# EAGLE board main_board (EAGLE 9.6.2)
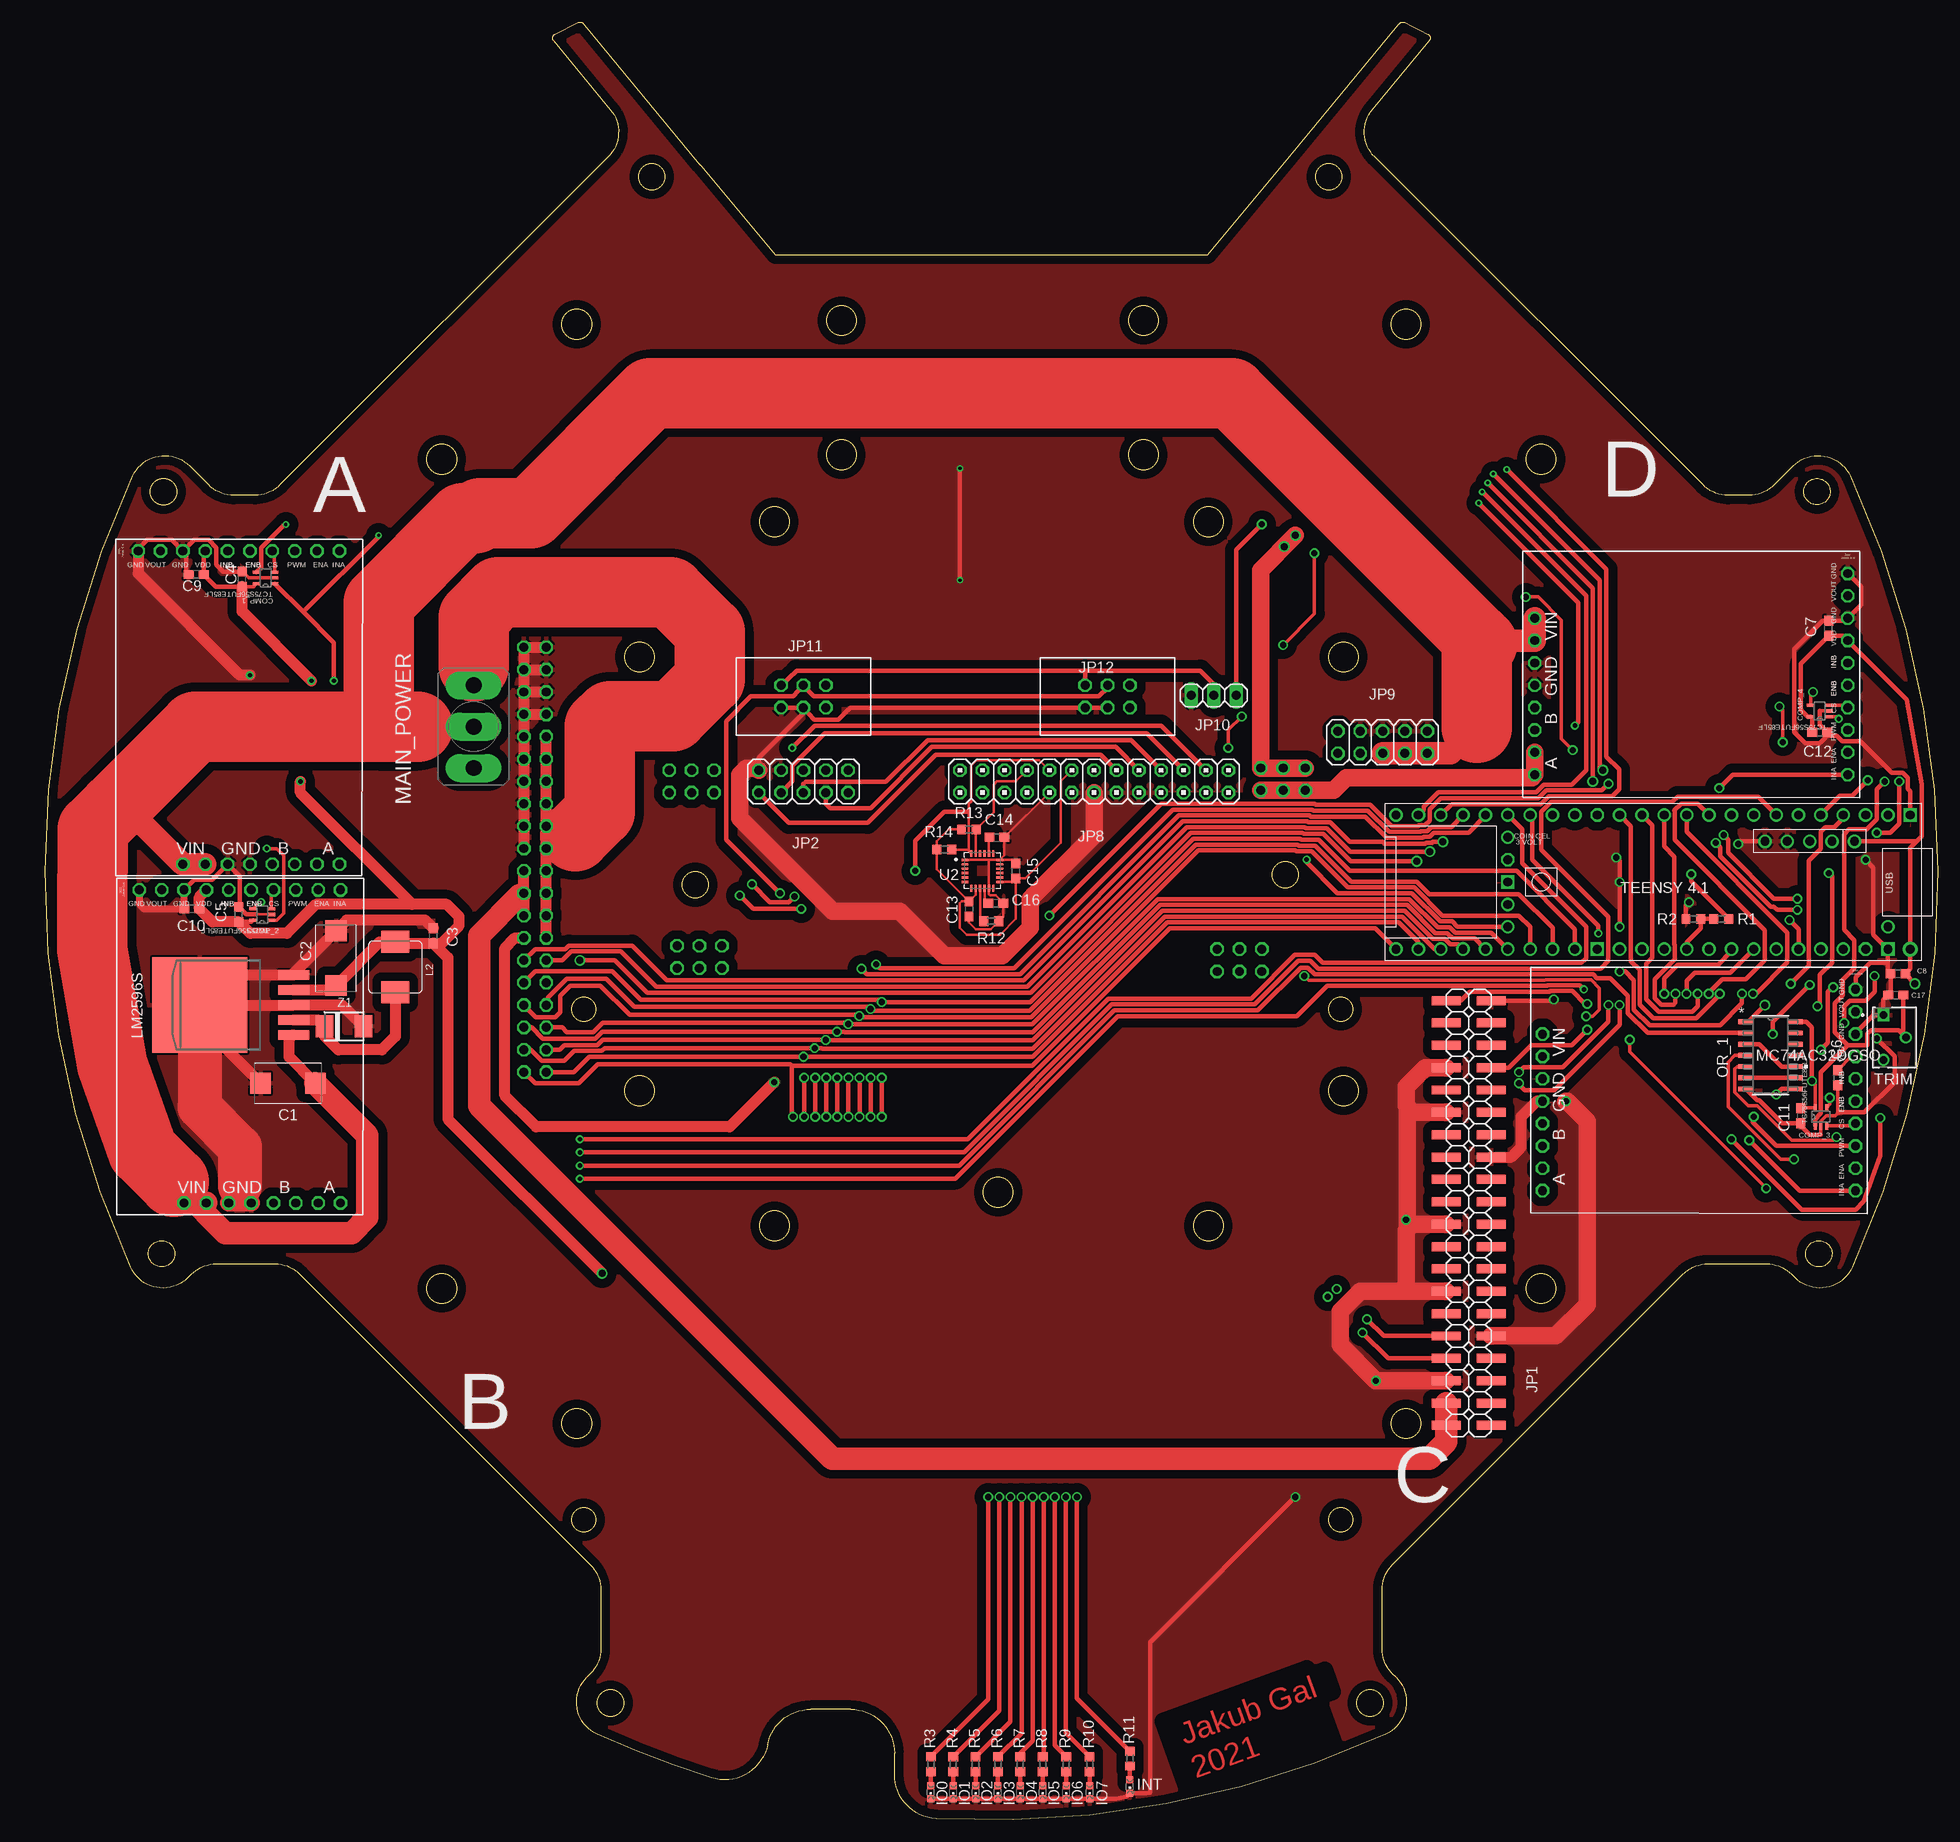
[diagram p0: board, top side]
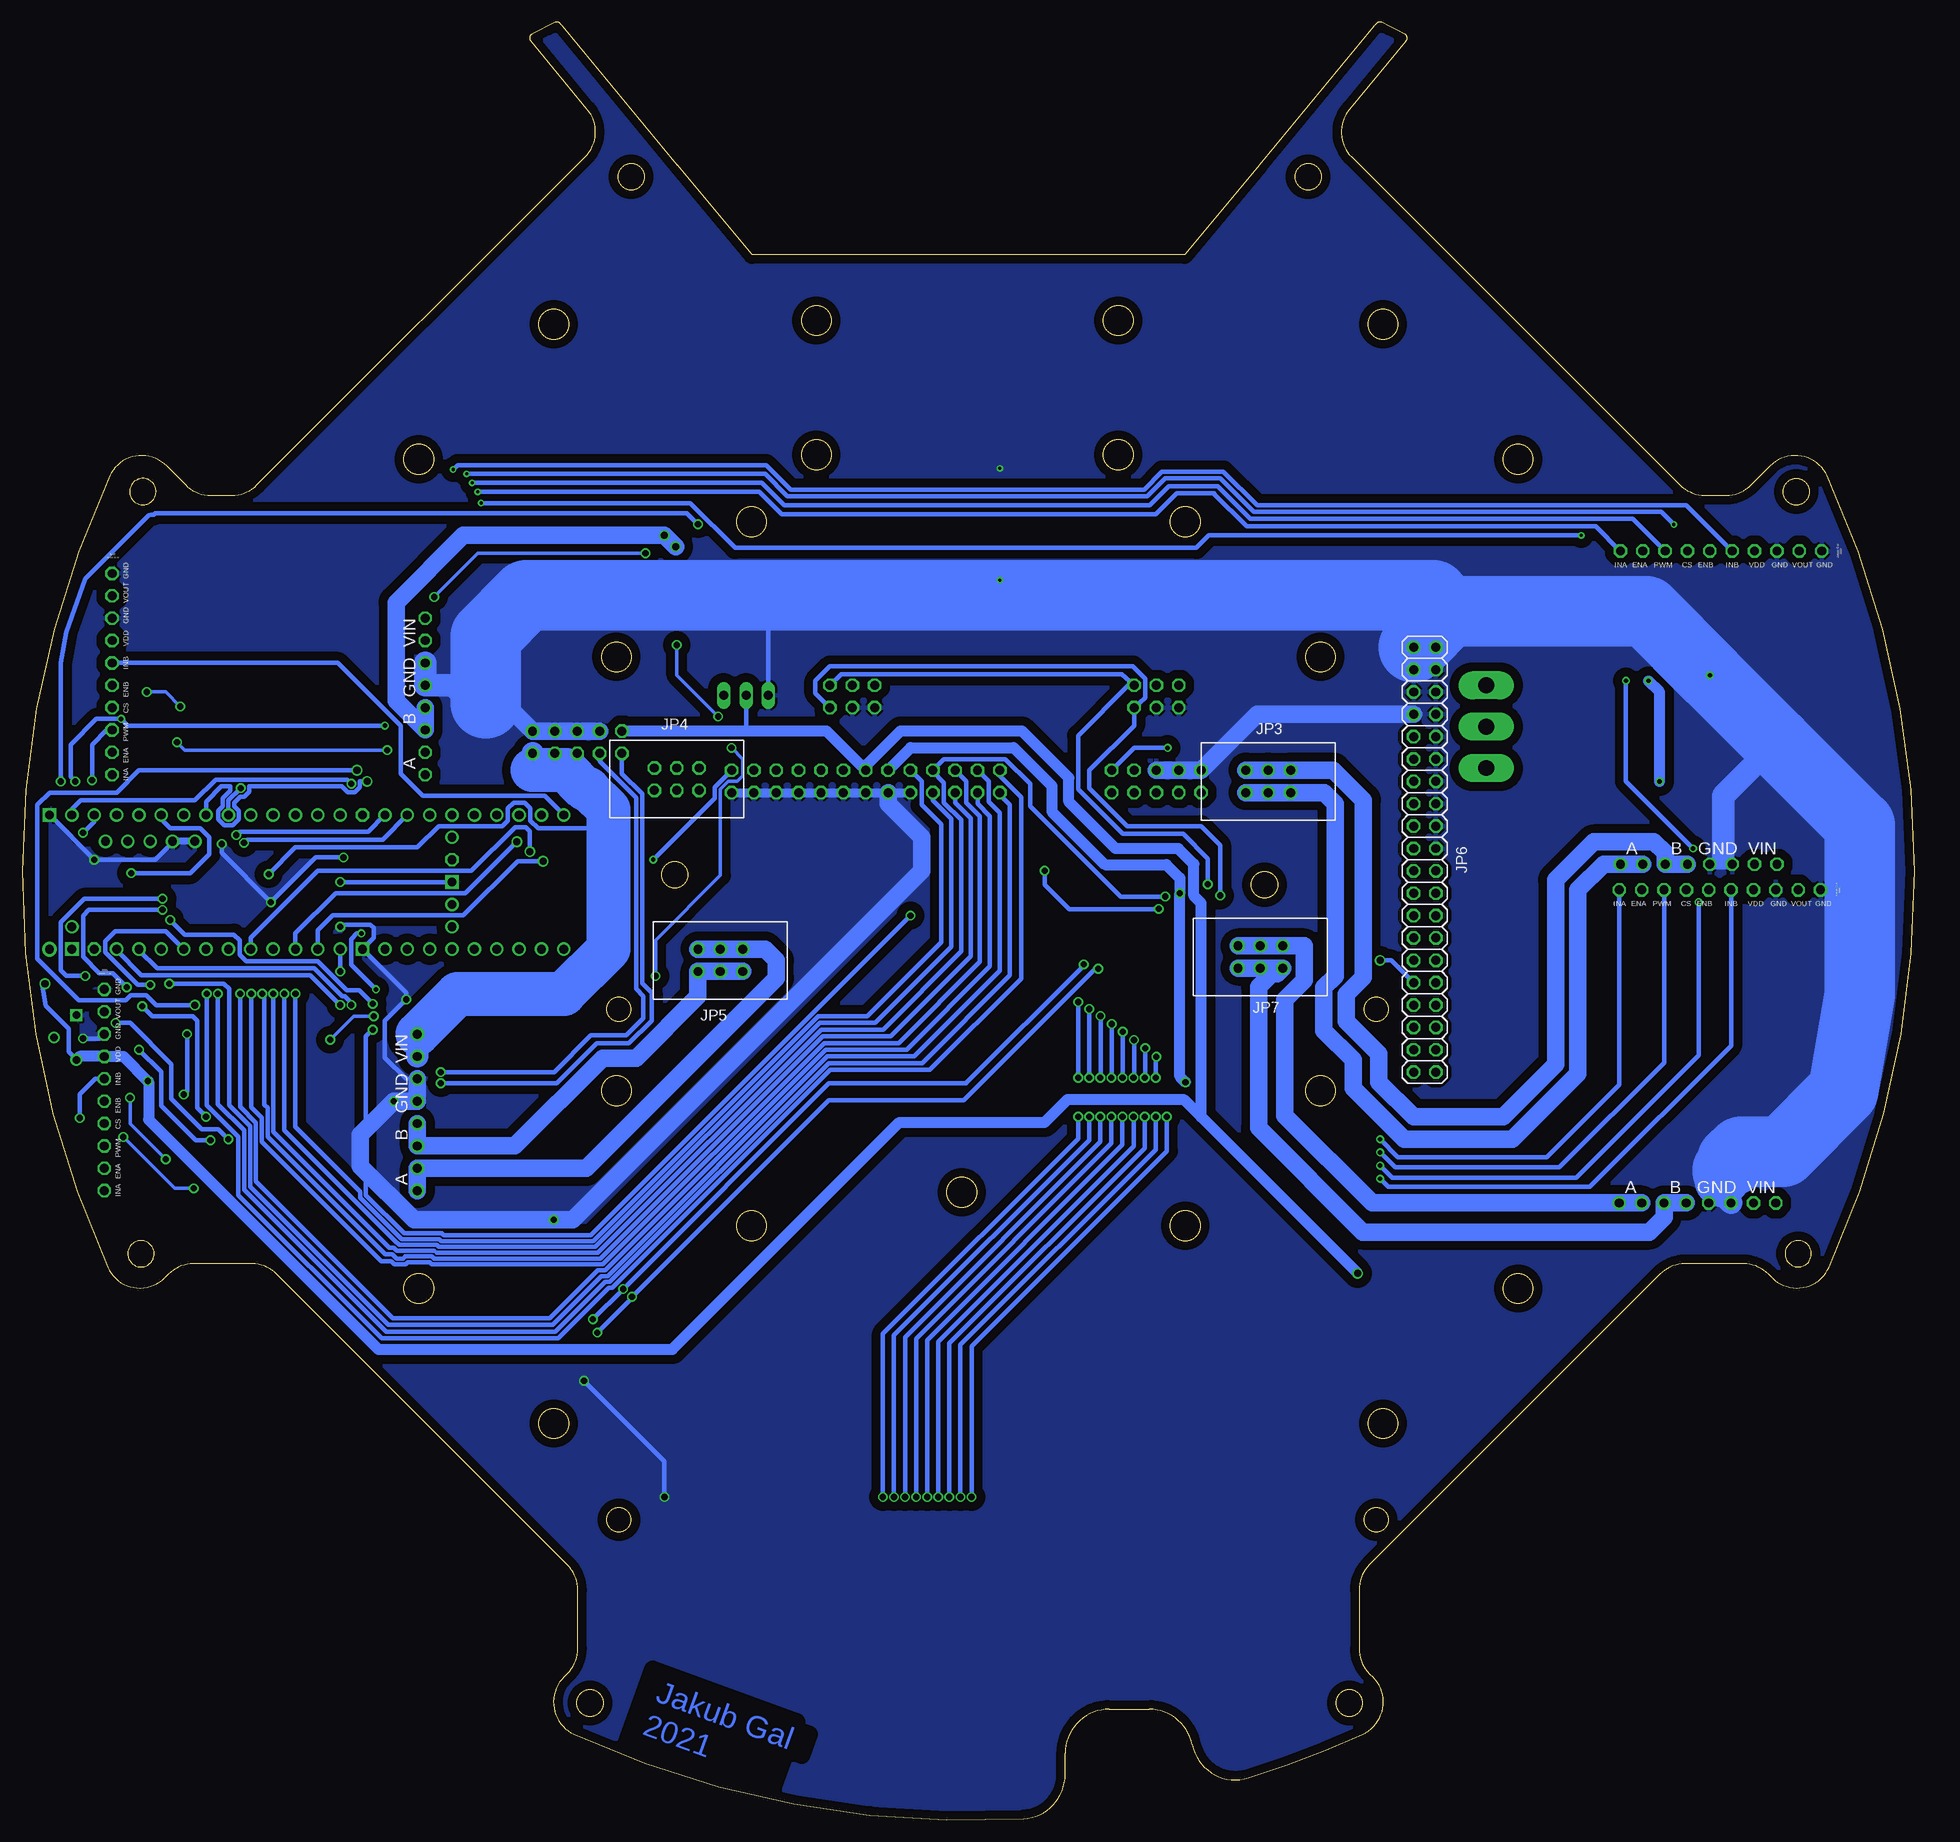
[diagram p1: board, bottom side, seen from below]

Size 215 x 204.23 mm. Coordinates in mm from the lower left corner, seen from the top.
Outline: 201.27,152.38 arc-199 200.78,149.47 arc-161 201.27,152.38
Outline: 201.48,65.82 arc-148 202.28,63.05 arc-212 201.48,65.82
Outline: 13.24,65.82 arc-231 12.07,63.38 arc-129 13.24,65.82
Outline: 74.49,187.97 74.44,187.97 61.32,203.85 61.15,204.05 61.13,204.08 arc20 60.99,204.18 60.99,204.18 arc52 60.55,204.18 arc2 57.92,202.86 arc102 57.77,202.1 64.23,194.28 arc-85 63.97,188.91 26.67,151.64 arc-45 23.84,150.47 21.42,150.47 arc-45 18.59,151.65 16.42,153.82 arc110 9.96,152.67 arc49 9.74,62.76 arc110 16.2,61.59 16.62,62 arc-45 19.44,63.17 26.13,63.17 arc-45 28.96,62 61.96,28.97 arc-45 63.13,26.15 63.13,19.46 arc-45 61.95,16.63 61.54,16.22 arc110 62.7,9.75 arc7 75.7,4.78 arc96 82.08,8.57 arc-79 86.98,12.57 91.5,12.57 arc-90 96.5,7.57 96.5,5.15 arc87 101.21,0.16 arc28 152.3,9.75 arc110 153.46,16.22 153.04,16.63 arc-45 151.87,19.46 151.87,26.15 arc-45 153.04,28.97 186.04,62 arc-45 188.87,63.17 195.55,63.17 arc-45 198.38,62 198.79,61.59 arc110 205.26,62.76 arc49 205.04,152.67 arc110 198.58,153.82 196.41,151.65 arc-45 193.58,150.47 191.16,150.47 arc-45 188.33,151.64 151.03,188.91 arc-85 150.77,194.28 157.23,202.1 arc102 157.08,202.86 arc2 154.45,204.18 arc52 154.01,204.18 154.01,204.18 arc23 153.85,204.06 153.84,204.05 153.68,203.85 140.55,187.97 140.51,187.97 132.05,177.77 82.94,177.77 74.49,187.97
Outline: circle at 61.19,92.11 radius 1.38
Outline: circle at 147.19,34.11 radius 1.38
Outline: circle at 67.51,132.11 radius 1.7
Outline: circle at 68.91,186.64 radius 1.5
Outline: circle at 132.14,147.46 radius 1.7
Outline: circle at 13.46,150.88 radius 1.5
Outline: circle at 147.49,132.11 radius 1.7
Outline: circle at 154.59,45.03 radius 1.7
Outline: circle at 61.19,34.11 radius 1.38
Outline: circle at 169.94,154.57 radius 1.7
Outline: circle at 150.49,13.28 radius 1.5
Outline: circle at 67.51,82.83 radius 1.7
Outline: circle at 73.86,106.23 radius 1.5
Outline: circle at 132.14,67.49 radius 1.7
Outline: circle at 147.49,82.83 radius 1.7
Outline: circle at 60.41,45.03 radius 1.7
Outline: circle at 45.06,60.38 radius 1.7
Outline: circle at 64.23,13.28 radius 1.5
Outline: circle at 145.81,186.64 radius 1.5
Outline: circle at 82.86,67.49 radius 1.7
Copper layers (1*16): Top 0.035mm / dielectric 1.5mm / Bottom 0.035mm
Design rules "default": minimum track width 6mil, minimum drill 0.35mm, track to track 6mil, track to pad 6mil, pad to pad 6mil, via to via 6mil, smd to smd 6mil, copper to edge 40mil, drill to drill 6mil, minimum pad ring 10mil, minimum via ring 8mil, stop-mask expansion 4mil, vias tented up to drill 0mil, thermal gap 10mil
tRestrict: area 127,2.5 to 146.5,17.2
bRestrict: area 127,2.5 to 146.5,17.1

## Footprints (pad centres in the part's own frame; a part is rotated, then mirrored left to right if it is on the bottom)
CAPM7343X310 = smd 2.368 x 2.404: 1 -3.121,0; 2 3.121,0
C0603 = smd 1.1 x 1: 1 -0.85,0; 2 0.85,0
SOT-353___(USV)_TOS = smd 0.833 x 0.355: 1 -1.039,0.65; 2 -1.039,0; 3 -1.039,-0.65; 4 1.039,-0.65; 5 1.039,0.65
MOTOR_DRIVER = drill 1 octagon: CS -2.54,-17.78; ENA/DIAGA -7.62,-17.78; ENB/DIAGB 0,-17.78; GND 0,17.78; GND_1 2.54,17.78; GND_2 7.62,-17.78; GND_3 12.7,-17.78; INA -10.16,-17.78; INB 2.54,-17.78; OUTA -10.16,17.78; OUTA_1 -7.62,17.78; OUTB -5.08,17.78; OUTB_1 -2.54,17.78; PWM -5.08,-17.78; VDD 5.08,-17.78; VIN 5.08,17.78; VIN_1 7.62,17.78; VOUT 10.16,-17.78
CHIPLED_0603 = smd 0.8 x 0.8: A 0,-0.75; C 0,0.75
2X20SMD = smd 1.016 x 3.302: 1 -1.27,-3.81; 2 -1.27,1.27; 3 1.27,-3.81; 4 1.27,1.27; 5 3.81,-3.81; 6 3.81,1.27; 7 6.35,-3.81; 8 6.35,1.27; 9 8.89,-3.81; 10 8.89,1.27; 11 11.43,-3.81; 12 11.43,1.27; 13 13.97,-3.81; 14 13.97,1.27; 15 16.51,-3.81; 16 16.51,1.27; 17 19.05,-3.81; 18 19.05,1.27; 19 21.59,-3.81; 20 21.59,1.27; 21 24.13,-3.81; 22 24.13,1.27; 23 26.67,-3.81; 24 26.67,1.27; 25 29.21,-3.81; 26 29.21,1.27; 27 31.75,-3.81; 28 31.75,1.27; 29 34.29,-3.81; 30 34.29,1.27; 31 36.83,-3.81; 32 36.83,1.27; 33 39.37,-3.81; 34 39.37,1.27; 35 41.91,-3.81; 36 41.91,1.27; 37 44.45,-3.81; 38 44.45,1.27; 39 46.99,-3.81; 40 46.99,1.27
2X05 = drill 1.016 octagon: 1 -5.08,-1.27; 2 -5.08,1.27; 3 -2.54,-1.27; 4 -2.54,1.27; 5 0,-1.27; 6 0,1.27; 7 2.54,-1.27; 8 2.54,1.27; 9 5.08,-1.27; 10 5.08,1.27
2X03_IDC = drill 1.016 octagon: 1 -2.54,-1.27; 2 -2.54,1.27; 3 0,-1.27; 4 0,1.27; 5 2.54,-1.27; 6 2.54,1.27
2X20 = drill 1.016 octagon: 1 -24.13,-1.27; 2 -24.13,1.27; 3 -21.59,-1.27; 4 -21.59,1.27; 5 -19.05,-1.27; 6 -19.05,1.27; 7 -16.51,-1.27; 8 -16.51,1.27; 9 -13.97,-1.27; 10 -13.97,1.27; 11 -11.43,-1.27; 12 -11.43,1.27; 13 -8.89,-1.27; 14 -8.89,1.27; 15 -6.35,-1.27; 16 -6.35,1.27; 17 -3.81,-1.27; 18 -3.81,1.27; 19 -1.27,-1.27; 20 -1.27,1.27; 21 1.27,-1.27; 22 1.27,1.27; 23 3.81,-1.27; 24 3.81,1.27; 25 6.35,-1.27; 26 6.35,1.27; 27 8.89,-1.27; 28 8.89,1.27; 29 11.43,-1.27; 30 11.43,1.27; 31 13.97,-1.27; 32 13.97,1.27; 33 16.51,-1.27; 34 16.51,1.27; 35 19.05,-1.27; 36 19.05,1.27; 37 21.59,-1.27; 38 21.59,1.27; 39 24.13,-1.27; 40 24.13,1.27
2X13 = drill 1.016 octagon: 1 -15.24,-1.27; 2 -15.24,1.27; 3 -12.7,-1.27; 4 -12.7,1.27; 5 -10.16,-1.27; 6 -10.16,1.27; 7 -7.62,-1.27; 8 -7.62,1.27; 9 -5.08,-1.27; 10 -5.08,1.27; 11 -2.54,-1.27; 12 -2.54,1.27; 13 0,-1.27; 14 0,1.27; 15 2.54,-1.27; 16 2.54,1.27; 17 5.08,-1.27; 18 5.08,1.27; 19 7.62,-1.27; 20 7.62,1.27; 21 10.16,-1.27; 22 10.16,1.27; 23 12.7,-1.27; 24 12.7,1.27; 25 15.24,-1.27; 26 15.24,1.27
1X03 = drill 1.016 long: 1 -2.54,0; 2 0,0; 3 2.54,0
INDUCTOR_L0630 = smd 2.5 x 3.2: 1 -2.85,0; 2 2.85,0
TO263-5 = smd 1.067 x 3.505: 1 -3.404,0.762; 2 -1.702,0.762; 3 0,0.762; 4 1.702,0.762; 5 3.404,0.762 | smd 10.82 x 10.82: 6 0,11.43
P-B069B = drill 1.803 pad 3.175 long: 1 -4.699,0; 2 0,0; 3 4.699,0
SOIC-14_NB_ONS-M = smd 1.702 x 0.533: 1 -2.807,3.81; 2 -2.807,2.54; 3 -2.807,1.27; 4 -2.807,0; 5 -2.807,-1.27; 6 -2.807,-2.54; 7 -2.807,-3.81; 8 2.807,-3.81; 9 2.807,-2.54; 10 2.807,-1.27; 11 2.807,0; 12 2.807,1.27; 13 2.807,2.54; 14 2.807,3.81
R0603 = smd 1 x 1.1: 1 -0.85,0; 2 0.85,0
TENNSY41-E = drill 1: 0-RX1/CS1/CRX2 -27.94,-7.62; 1-TX1/MISO1/CTX2 -25.4,-7.62; 2-OUT2 -22.86,-7.62; 3-LRCLK2 -20.32,-7.62; 4-BCLK2 -17.78,-7.62; 5-IN2 -15.24,-7.62; 6-OUT1D -12.7,-7.62; 7-RX2/OUT1A -10.16,-7.62; 8-TX2/IN1 -7.62,-7.62; 9-OUT1C -5.08,-7.62; 10-CS\MQSR -2.54,-7.62; 11-MOSI/CTX1 0,-7.62; 12-MISO/MQSL 2.54,-7.62; 13-SCK/LED 2.54,7.62; 14-A0/TX3/SPDIF_OUT 0,7.62; 15-A1/RX3/SPDIF_IN -2.54,7.62; 16-A2/RX4/SCL1 -5.08,7.62; 17-A3/TX4/SDA1 -7.62,7.62; 18-A4/SDA0 -10.16,7.62; 19-A5/SCL0 -12.7,7.62; 20-A6/TX5/LRCLK1 -15.24,7.62; 21-A7/RX5/BCLK1 -17.78,7.62; 22-A8/CTX1 -20.32,7.62; 23-A9/CRX1/MCLK1 -22.86,7.62; 24-A10/TX6/SCL2 7.62,-7.62; 25-A11/RX6/SDA2 10.16,-7.62; 26-A12/MOSI1 12.7,-7.62; 27-A13/SCK1 15.24,-7.62; 28-RX7 17.78,-7.62; 29-TX7 20.32,-7.62; 30-CRX3 22.86,-7.62; 31-CTX3 25.4,-7.62; 32-OUT1B 27.94,-7.62; 33-MCLK2 27.94,7.62; 34-RX8 25.4,7.62; 35-TX8 22.86,7.62; 36-PWM 20.32,7.62; 37-PWM 17.78,7.62; 38-A14/CS/IN1 15.24,7.62; 39-A15/CS/OUT1A 12.7,7.62; 40-A16/CS1 10.16,7.62; 41-A17/MISO1 7.62,7.62; +5V -24.13,-4.62; DM -21.59,-4.62; DP -19.05,-4.62; GND4 -16.51,-4.62; GND5 -13.97,-4.62; ON/OFF 15.24,5.08; PROGRAM 15.24,2.54; VBAT 15.24,-5.08; VUSB -27.94,5.08 | drill 1 octagon: 3V3-1 5.08,-7.62; 3V3-2 15.24,-2.54; 3V3-3 -25.4,7.62 | drill 1 square: GND1 -30.48,-7.62; GND2 15.24,0; GND3 5.08,7.62; GND6 -27.94,7.62 | drill 1 pad 1.676: VIN -30.48,7.62
POT_3362W = drill 0.838 pad 1.346 square: 1 0,0 | drill 0.838 pad 1.346: 2 2.54,2.54; 3 5.08,0
QFN50P400X400X95-24N = smd 0.79 x 0.26: 1 -1.97,1.25; 2 -1.97,0.75; 3 -1.97,0.25; 4 -1.97,-0.25; 5 -1.97,-0.75; 6 -1.97,-1.25; 13 1.97,-1.25; 14 1.97,-0.75; 15 1.97,-0.25; 16 1.97,0.25; 17 1.97,0.75; 18 1.97,1.25 | smd 0.26 x 0.79: 7 -1.25,-1.97; 8 -0.75,-1.97; 9 -0.25,-1.97; 10 0.25,-1.97; 11 0.75,-1.97; 12 1.25,-1.97; 19 1.25,1.97; 20 0.75,1.97; 21 0.25,1.97; 22 -0.25,1.97; 23 -0.75,1.97; 24 -1.25,1.97
SUPRESSOR_SMAJ = smd 2 x 2.5: A 2.223,0; C -2.223,0

## Placement (x,y rotation side)
C1  330uF  [CAPM7343X310]  27.6,83.68 180 top
C2  220uF  [CAPM7343X310]  33.06,97.9 90 top
C3  100nF  [C0603]  44.11,100.44 90 top
C4  100nF  [C0603]  22.39,140.96 90 top
C5  100nF  [C0603]  22.01,102.86 90 top
C6  100nF  [C0603]  203.62,84.31 270 top
C7  100nF  [C0603]  202.6,135.37 90 top
C8  100nF  [C0603]  210.48,96.12 180 top
C9  100nF  [C0603]  17.18,141.46 180 top
C10  100nF  [C0603]  16.68,103.49 180 top
C11  100nF  [C0603]  199.43,80 270 top
C12  100nF  [C0603]  201.59,123.56 0 top
C13  10nF  [C0603]  104.94,103.49 270 top
C14  2200pF  [C0603]  108.12,111.62 0 top
C15  100nF  [C0603]  110.27,107.81 90 top
C16  100nF  [C0603]  107.99,104.13 0 top
C17  100nF  [C0603]  210.22,93.71 0 top
COMP_1  TC75S56FUTE85LF  [SOT-353___(USV)_TOS]  25.06,141.08 180 top
COMP_2  TC75S56FUTE85LF  [SOT-353___(USV)_TOS]  24.68,102.86 180 top
COMP_3  TC75S56FUTE85LF  [SOT-353___(USV)_TOS]  201.71,79.87 90 top
COMP_4  TC75S56FUTE85LF  [SOT-353___(USV)_TOS]  201.59,125.97 180 top
DRIVER_A  MOTOR_DRIVER  [MOTOR_DRIVER]  23.28,126.35 180 top
DRIVER_B  MOTOR_DRIVER  [MOTOR_DRIVER]  23.41,87.87 180 top
DRIVER_C  MOTOR_DRIVER  [MOTOR_DRIVER]  187.87,81.65 90 top
DRIVER_D  MOTOR_DRIVER  [MOTOR_DRIVER]  186.98,128.89 90 top
INT  LEDCHIPLED_0603  [CHIPLED_0603]  123.23,3.8 180 top
IO0  LEDCHIPLED_0603  [CHIPLED_0603]  100.62,3.16 180 top
IO1  LEDCHIPLED_0603  [CHIPLED_0603]  103.16,3.16 180 top
IO2  LEDCHIPLED_0603  [CHIPLED_0603]  105.7,3.16 180 top
IO3  LEDCHIPLED_0603  [CHIPLED_0603]  108.24,3.16 180 top
IO4  LEDCHIPLED_0603  [CHIPLED_0603]  110.78,3.16 180 top
IO5  LEDCHIPLED_0603  [CHIPLED_0603]  113.32,3.16 180 top
IO6  LEDCHIPLED_0603  [CHIPLED_0603]  115.99,3.16 180 top
IO7  LEDCHIPLED_0603  [CHIPLED_0603]  118.66,3.16 180 top
JP1  [2X20SMD]  160.44,46.09 90 top
JP2  [2X05]  86.14,117.97 0 top
JP3  [2X03_IDC]  73.44,117.97 0 bottom
JP4  [2X03_IDC]  140.63,118.22 0 bottom
JP5  [2X03_IDC]  135.67,97.65 180 bottom
JP6  [2X20]  55.66,109.08 90 bottom
JP7  [2X03_IDC]  74.33,98.03 180 bottom
JP8  [2X13]  119.16,117.97 180 top
JP9  [2X05]  151.93,122.41 0 top
JP10  [1X03]  132.75,127.75 180 top
JP11  [2X03_IDC]  86.14,127.62 0 top
JP12  [2X03_IDC]  120.69,127.62 0 top
L2  22UH  [INDUCTOR_L0630]  39.79,96.89 90 top
LM2596S  LM2596S-5  [TO263-5]  28.99,92.57 90 top
MAIN_POWER  [P-B069B]  48.68,124.19 270 top
OR_1  MC74AC32DGSO  [SOIC-14_NB_ONS-M]  196,86.85 0 top
R1  10K  [R0603]  190.41,102.35 180 top
R2  2K  [R0603]  187.24,102.35 180 top
R3  220R  [R0603]  100.62,6.34 90 top
R4  220R  [R0603]  103.16,6.34 90 top
R5  220R  [R0603]  105.7,6.34 90 top
R6  220R  [R0603]  108.24,6.34 90 top
R7  220R  [R0603]  110.78,6.34 90 top
R8  220R  [R0603]  113.32,6.34 90 top
R9  220R  [R0603]  115.99,6.34 90 top
R10  220R  [R0603]  118.66,6.34 90 top
R11  220R  [R0603]  123.23,6.97 90 top
R12  4.7K  [R0603]  107.48,102.09 0 top
R13  4.7K  [R0603]  104.94,112.51 0 top
R14  4.7K  [R0603]  102.15,110.22 0 top
TEENSY41  TEENSY41-E  [TENNSY41-E]  181.39,106.54 180 top
TRIM  3362W-1-103LF  [POT_3362W]  208.83,91.43 270 top
U2  MPU-6050  [QFN50P400X400X95-24N]  106.46,107.81 0 top
Z1  1n5824  [SUPRESSOR_SMAJ]  33.95,90.16 0 top

## Library data of the parts
C1 C2 = Capacitor; CATEGORY: Capacitor
C3-C17 = rcl; SPICEPREFIX: C
COMP_1-COMP_4 = comparator
DRIVER_A DRIVER_B DRIVER_C DRIVER_D = Moja
INT IO0 IO1-IO7 = audio amplifier example
JP1-JP9 JP11 JP12 = pinhead-1
JP10 = Connector; CATEGORY: CONNECTOR; SUB-CATEGORY: PIN-HEADER
L2 = BeagleBone_Blue_R3
LM2596S MAIN_POWER = TABOR K1
OR_1 = 74VHC32D; COPYRIGHT: Copyright (C) 2016 Accelerated Designs. All rights reserved; MANUFACTURER_PART_NUMBER: MC74VHC32DR2G; SOURCELIBRARY: ONSemi_2017-12-12_1; VENDOR: ON Semiconductor
R1-R14 = rcl; SPICEPREFIX: R
TEENSY41 = teensy
TRIM = 3362; BUILT_BY: EMA_UL_Team; MANUFACTURER_PART_NUMBER: 3362W-1-103LF; SOURCELIBRARY: Bourns_2012-08-08; VENDOR: Bourns Electronics
U2 = MPU-6050; AVAILABILITY: Warning; DESCRIPTION: Accelerometer, Gyroscope, 6 Axis Sensor I²C Output; DIGIKEY-PURCHASE-URL: https://snapeda.com/shop?store=DigiKey&id=4705740; MF: TDK InvenSense; MOUSER-PURCHASE-URL: https://snapeda.com/shop?store=Mouser&id=4705740; MP: MPU-6050; PACKAGE: VFQFN-24 TDK InvenSense; PRICE: None
Z1 = 52101-101-REV-A

## Nets
3.3V: C13.1 C15.1 JP6.13 JP8.15 JP11.4 JP12.4 R13.1 R14.1 U2.8 U2.13
3.3V_0: JP1.1
3.3V_1: JP1.17
5V: C2.1 C3.1 C4.1 C5.1 C6.1 C7.1 C8.1 C9.1 C10.1 C11.1 C12.1 COMP_1.5 COMP_2.5 COMP_3.5 COMP_4.5 DRIVER_A.VDD DRIVER_B.VDD DRIVER_C.VDD DRIVER_D.VDD JP8.13 JP9.2 JP10.2 JP11.2 JP12.2 L2.2 LM2596S.4 OR_1.14 TEENSY41.+5V TEENSY41.VIN TRIM.3
5V_JATSON: JP1.2 JP1.4 JP6.15 JP6.17 JP6.19
AUTO_ON: JP2.7 JP8.9
BAT: C1.1 DRIVER_A.VIN DRIVER_A.VIN_1 DRIVER_B.VIN DRIVER_B.VIN_1 DRIVER_C.VIN DRIVER_C.VIN_1 DRIVER_D.VIN DRIVER_D.VIN_1 JP9.5 JP9.7 JP9.9 LM2596S.1 MAIN_POWER.2 R1.1
BAT_IN: JP6.14 JP6.16 JP6.18 JP6.20 JP6.22 JP6.24 JP6.26 JP6.28 JP6.30 JP6.32 MAIN_POWER.1
CAMERA_PWM: JP10.1 TEENSY41.1-TX1/MISO1/CTX2
CAPACITOR: JP6.11 TEENSY41.15-A1/RX3/SPDIF_IN
COM_A: COMP_1.4 OR_1.1
COM_AB: OR_1.3 OR_1.10
COM_ABCD: OR_1.8 TEENSY41.20-A6/TX5/LRCLK1
COM_B: COMP_2.4 OR_1.2
COM_C: COMP_3.4 OR_1.4
COM_CD: OR_1.6 OR_1.9
COM_D: COMP_4.4 OR_1.5
CS: JP8.20 TEENSY41.10-CS\MQSR
CS_MOT_A: COMP_1.3 DRIVER_A.CS
CS_MOT_B: COMP_2.3 DRIVER_B.CS
CS_MOT_C: COMP_3.3 DRIVER_C.CS
CS_MOT_D: COMP_4.3 DRIVER_D.CS
D0/ID_SD: JP1.27
D1/ID_SC: JP1.28
D4: JP1.7
D5: JP1.29
D6: JP1.31
D7: JP1.26
D8: JP1.24
D9: JP1.21
D10: JP1.19
D11: JP1.23
D12: JP1.32
D13: JP1.33 TEENSY41.0-RX1/CS1/CRX2
D16: JP1.36
D17: JP1.11
D18: JP1.12
D19: JP1.35
D20: JP1.38
D21: JP1.40 TEENSY41.21-A7/RX5/BCLK1
D22: JP1.15
D23: JP1.16
D24: JP1.18
D25\: JP1.22
D26: JP1.37
D27: JP1.13
D/C: JP8.25 TEENSY41.9-OUT1C
DRIBLER_PWM: JP9.3 TEENSY41.22-A8/CTX1
DRIBLER_SWITCH: JP9.1 TEENSY41.23-A9/CRX1/MCLK1
FC_REC: JP2.3 JP8.5
GND: C1.2 C2.2 C3.2 C4.2 C5.2 C6.2 C7.2 C8.2 C9.2 C10.2 C11.2 C12.2 C13.2 C14.2 C15.2 C16.2 C17.1 COMP_1.2 COMP_2.2 COMP_3.2 COMP_4.2 DRIVER_A.GND DRIVER_A.GND_1 DRIVER_A.GND_2 DRIVER_A.GND_3 DRIVER_B.GND DRIVER_B.GND_1 DRIVER_B.GND_2 DRIVER_B.GND_3 DRIVER_C.GND DRIVER_C.GND_1 DRIVER_C.GND_2 DRIVER_C.GND_3 DRIVER_D.GND DRIVER_D.GND_1 DRIVER_D.GND_2 DRIVER_D.GND_3 INT.C IO0.C IO1.C IO2.C IO3.C IO4.C IO5.C IO6.C IO7.C JP1.6 JP1.9 JP1.14 JP1.20 JP1.25 JP1.30 JP1.34 JP1.39 JP2.2 JP2.4 JP2.6 JP6.21 JP6.23 JP6.25 JP6.27 JP6.29 JP6.31 JP6.33 JP6.34 JP6.35 JP6.36 JP6.37 JP6.38 JP6.39 JP6.40 JP8.2 JP8.4 JP8.6 JP8.8 JP8.10 JP8.12 JP8.14 JP8.16 JP8.18 JP9.4 JP9.6 JP9.8 JP9.10 JP10.3 JP11.1 JP11.3 JP12.1 JP12.3 LM2596S.3 LM2596S.5 LM2596S.6 OR_1.7 R2.2 R12.2 TEENSY41.GND1 TEENSY41.GND2 TEENSY41.GND3 TEENSY41.GND4 TEENSY41.GND5 TEENSY41.GND6 TRIM.1 U2.1 U2.11 U2.18 Z1.A
IN_A_MOT_A: DRIVER_A.INA TEENSY41.31-CTX3
IN_A_MOT_B: DRIVER_B.INA TEENSY41.27-A13/SCK1
IN_A_MOT_C: DRIVER_C.INA TEENSY41.25-A11/RX6/SDA2
IN_A_MOT_D: DRIVER_D.INA TEENSY41.7-RX2/OUT1A
IN_B_MOT_A: DRIVER_A.INB TEENSY41.30-CRX3
IN_B_MOT_B: DRIVER_B.INB TEENSY41.26-A12/MOSI1
IN_B_MOT_C: DRIVER_C.INB TEENSY41.24-A10/TX6/SCL2
IN_B_MOT_D: DRIVER_D.INB TEENSY41.32-OUT1B
INT_3V: JP6.9 R11.2 TEENSY41.41-A17/MISO1
IO0_3V: JP6.1 R3.2 TEENSY41.33-MCLK2
IO1_3V: JP6.2 R4.2 TEENSY41.34-RX8
IO2_3V: JP6.3 R5.2 TEENSY41.35-TX8
IO3_3V: JP6.4 R6.2 TEENSY41.36-PWM
IO4_3V: JP6.5 R7.2 TEENSY41.37-PWM
IO5_3V: JP6.6 R8.2 TEENSY41.38-A14/CS/IN1
IO6_3V: JP6.7 R9.2 TEENSY41.39-A15/CS/OUT1A
IO7_3V: JP6.8 R10.2 TEENSY41.40-A16/CS1
KICK: JP6.10 TEENSY41.14-A0/TX3/SPDIF_OUT
LED-: JP2.10 JP8.3
MISO: JP8.24 TEENSY41.12-MISO/MQSL
MOSI: JP8.22 TEENSY41.11-MOSI/CTX1
MOT_A_A: DRIVER_A.OUTA DRIVER_A.OUTA_1 JP3.1 JP3.3 JP3.5
MOT_A_B: DRIVER_A.OUTB DRIVER_A.OUTB_1 JP3.2 JP3.4 JP3.6
MOT_B_A: DRIVER_B.OUTA DRIVER_B.OUTA_1 JP7.1 JP7.3 JP7.5
MOT_B_B: DRIVER_B.OUTB DRIVER_B.OUTB_1 JP7.2 JP7.4 JP7.6
MOT_C_A: DRIVER_C.OUTA DRIVER_C.OUTA_1 JP5.1 JP5.3 JP5.5
MOT_C_B: DRIVER_C.OUTB DRIVER_C.OUTB_1 JP5.2 JP5.4 JP5.6
MOT_D_A: DRIVER_D.OUTA DRIVER_D.OUTA_1 JP4.1 JP4.3 JP4.5
MOT_D_B: DRIVER_D.OUTB DRIVER_D.OUTB_1 JP4.2 JP4.4 JP4.6
N$1: IO0.A R3.1
N$2: IO1.A R4.1
N$3: C14.1 U2.20
N$4: IO2.A R5.1
N$5: R12.1 U2.9
N$6: IO3.A R6.1
N$7: C16.1 U2.10
N$8: IO4.A R7.1
N$10: IO5.A R8.1
N$12: IO6.A R9.1
N$14: IO7.A R10.1
N$16: INT.A R11.1
N$61: L2.1 LM2596S.2 Z1.C
ON/OFF: JP8.1 TEENSY41.ON/OFF
PWM_MOT_A: DRIVER_A.PWM TEENSY41.6-OUT1D
PWM_MOT_B: DRIVER_B.PWM TEENSY41.5-IN2
PWM_MOT_C: DRIVER_C.PWM TEENSY41.4-BCLK2
PWM_MOT_D: DRIVER_D.PWM TEENSY41.3-LRCLK2
PWR_BTN: JP2.1 JP8.11
REF_MOTOR: C17.2 COMP_1.1 COMP_2.1 COMP_3.1 COMP_4.1 TRIM.2
RXD/D15: JP1.10 TEENSY41.29-TX7
SCK: JP8.26 TEENSY41.13-SCK/LED
SCL: JP8.19 JP11.6 JP12.6 R13.2 TEENSY41.19-A5/SCL0 U2.23
SCL/D3: JP1.5
SDA: JP8.17 JP11.5 JP12.5 R14.2 TEENSY41.18-A4/SDA0 U2.24
SDA/D2: JP1.3
SYS_RST: JP2.5 JP8.7
T_CS: JP8.21 TEENSY41.8-TX2/IN1
T_IRQ: JP8.23 TEENSY41.2-OUT2
TXD/D14: JP1.8 TEENSY41.28-RX7
UART_RXD: JP2.9
UART_TXD: JP2.8
V_BAT: R1.2 R2.1 TEENSY41.16-A2/RX4/SCL1
V_CAP: JP6.12 TEENSY41.17-A3/TX4/SDA1

## Tracks (layer width: path | path; a pad name or v marks a point on that pad's centre or on a via)
3.3V  (via drill 0.7)
  Top 0.305: R13.1 102.65,112.51 101.3,111.15 R14.1 101.3,107.98 C13.1 | C13.1 105.71,105.11 U2.8 | U2.13 109.87,106.56 C15.1 | C15.1 110.27,102.35 108.5,100.57 104.69,100.57 103.92,101.33 103.92,104.13 104.14,104.34 C13.1 | C15.1 111.33,106.96 115.35,110.98 115.35,117.97 JP8.15
  Top 0.508: v83.48,105.27 77.38,111.36 77.38,124.83 80.18,127.62 84.99,127.62 JP11.4 87.3,127.62 119.69,127.62 120.69,128.62 JP12.4
  Top 1.27: v82.84,83.81 77.76,78.73 55.79,78.73 52.24,82.28 52.24,99.05 53.38,100.19 JP6.13
  Bottom 1.27: JP8.15 114.06,121.8 102.35,121.8 98.01,117.46 98.01,114.53 91.99,108.52 85.01,108.52 83.48,106.99 v83.48,105.27 83.48,84.44 v82.84,83.81
5V  (via drill 0.5, 0.7, 0.8)
  Top 0.406: COMP_1.5 23.69,140.11 C4.1 | C11.1 199.49,80.91 COMP_3.5 201.06,83.57 v200.7,83.93 | C6.1 205.18,86.73 DRIVER_C.VDD
  Top 0.508: C5.1 23.44,102.01 COMP_2.5 | DRIVER_A.VDD 18.03,143.96 C9.1 19.39,140.11 C4.1 | v212.39,94.99 211.33,96.05 C8.1 211.87,96.67 TEENSY41.VIN 211.87,110.42 212.61,111.16 | C12.1 200.74,125.13 COMP_4.5 200.21,125.32 199.43,126.1 199.43,131.34 C7.1 204.22,134.52 DRIVER_D.VDD 211.48,127.26 213.18,117.62 213.2,111.74 212.61,111.16 | 212.61,111.16 TEENSY41.+5V | OR_1.14 200.06,90.66 200.7,90.03 v200.7,83.93 | JP11.2 85.38,130.54 118.15,130.54 | 118.15,130.54 131.23,130.54 132.75,129.02 JP10.2 | JP12.2 118.15,130.54
  Top 1.27: LM2596S.4 32.55,94.27 C2.1 38.01,99.74 L2.2 39.93,99.59 C3.1 | C3.1 45.04,99.59 47.03,101.59 47.03,102.6 45.63,104 41.69,104 | C3.1 45.76,97.94 45.76,79.61 v63.28,62.09 | 41.69,104 30.77,104 27.47,100.7 23.32,100.7 C5.1 19.01,102.01 C10.1 17.53,104.85 DRIVER_B.VDD | 41.69,104 28.99,116.7 v28.99,117.97 | v30.26,129.4 22.39,137.27 C4.1
  Bottom 0.508: TRIM.3 209.72,87.23 209.72,89.9 212.31,92.5 212.77,95.17 212.57,95.17 v212.39,94.99 | JP10.2 132.75,124.06 133.13,123.68
  Bottom 1.27: v28.99,117.97 28.99,128.13 v30.26,129.4 | v63.28,62.09 81.06,79.87 | 81.06,79.87 83.04,81.84 96.22,81.84 98.84,79.23 115.35,79.23 141.14,53.45 174.53,53.45 200.62,79.54 200.62,83.86 v200.7,83.93 203.49,86.73 DRIVER_C.VDD 208.45,86.73 TRIM.3 | JP9.2 133.13,123.68 123.61,123.68 JP8.13 119.16,119.75 115.23,123.68 101.38,123.68 96.08,118.37 96.08,115.63 90.77,110.32 83.65,110.32 81.9,108.57 81.9,104.97 81.06,104.13 81.06,79.87
5V_JATSON
  Top 1.27: JP1.2 JP1.4 | 53.89,105.01 54.39,104.51 JP6.15 JP6.17 JP6.19
  Top 2.54: JP1.4 159.17,42.98 157.24,41.05 89.4,41.05 49.31,81.14 49.31,100.44 53.89,105.01
AUTO_ON
  Top 0.508: JP2.7 88.68,115.43 89.19,114.92 93.76,114.92 100.72,121.88 121.6,121.88 JP8.9
BAT  (via drill 0.7)
  Top 0.508: R1.1 186.98,106.63 v186.98,107.43
  Top 1.27: C1.1 27.72,86.67 27.72,88.76 28.13,89.16 LM2596S.1
  Top 2.54: 42.33,124.19 MAIN_POWER.2 | 14.64,72.5 15.79,71.36 | 15.79,71.36 DRIVER_B.VIN_1 DRIVER_B.VIN | DRIVER_A.VIN DRIVER_A.VIN_1 9.25,114.98 7.85,114.98 | DRIVER_D.VIN_1 DRIVER_D.VIN 163.61,133.97 163.23,133.59 | JP9.5 JP9.7 JP9.9 159.68,121.14 162.6,124.06 | C1.1 36.61,77.78 36.61,68.44 34.84,66.66 20.49,66.66 15.79,71.36
  Top 8: 37.88,124.19 42.33,124.19 | 37.88,124.19 17.06,124.19 7.85,114.98 5.41,112.54 5.38,102.47 5.38,98.84 7.62,85.79 11.1,76.04 14.64,72.5 | 37.88,124.19 37.88,138.29 47.45,147.85 48.84,147.85 49.44,148.45 55.16,148.45 68.75,162.04 134.79,162.04 162.6,134.22 | 162.6,134.22 162.6,124.06 | 163.23,133.59 162.6,134.22
  Bottom 0.508: v186.98,107.43 183.93,110.48 170.09,110.48 167.68,112.89 160.44,112.89 159.8,113.52 159.8,114.92 159.17,115.56 157.9,115.56 157.26,114.92 157.26,113.52 156.38,112.63 150.53,112.63 148.37,114.79
  Bottom 2.54: DRIVER_C.VIN DRIVER_C.VIN_1 | 157.01,119.24 JP9.9
  Bottom 5: DRIVER_C.VIN_1 165.52,93.84 153.45,93.84 148.37,98.92 148.37,114.79 150.68,117.09 151.06,117.09 153.2,119.24 157.01,119.24
BAT_IN
  Top 1.016: 60.24,111.75 58.08,111.75 JP6.24
  Top 1.27: JP6.14 JP6.16 JP6.18 JP6.20 JP6.22 JP6.24 JP6.26 JP6.28 JP6.30 JP6.32
  Top 2.54: MAIN_POWER.1 48.68,131.05
  Top 8: 48.68,131.05 48.68,136.64 51.47,139.43 71.03,139.43 75.48,134.99 75.48,129.58 71.29,125.4 64.17,125.4 63.03,124.26 63.03,114.54 60.24,111.75
CAMERA_PWM  (via drill 0.7)
  Top 0.508: JP10.1 135.29,144.26 v138.21,147.18 | v210.6,117.97 210.6,113.14 209.59,112.13 v208.06,112.13
  Bottom 0.508: v138.21,147.18 139.48,148.45 199.85,148.45 200.04,148.27 200.36,148.27 200.61,148.18 207.79,141 209.99,134.92 210.6,131.47 v210.6,117.97 | v208.06,112.13 206.79,113.4 TEENSY41.1-TX1/MISO1/CTX2
CAPACITOR  (via drill 0.8)
  Top 0.508: JP6.11 55.66,98.92 59.09,98.92 59.49,99.32 66.69,99.32 70.62,95.39 111.19,95.39 129.23,113.44 143.38,113.44 143.5,113.32 145.99,113.32 148.2,111.11 151.92,111.11 152.13,110.91 156.78,110.91 156.88,111.02 157.56,111.02 157.65,111.11 v158.79,111.11
  Bottom 0.508: v158.79,111.11 164.63,105.27 179.36,105.27 183.93,100.7 TEENSY41.15-A1/RX3/SPDIF_IN
COM_A  (via drill 0.35, 0.8)
  Top 0.508: COMP_1.4 24.55,142.26 24.55,144.5 27.2,147.15 v27.36,147.15 | v176.95,119.24 176.58,119.24 176.58,140.82 v164.5,152.89 | v195.36,92.57 193.46,90.66 OR_1.1
  Bottom 0.508: v176.95,119.24 201.71,119.24 204.25,116.7 211.87,116.7 213.27,115.3 213.27,97.84 208.57,93.13 203.22,93.13 202.67,93.69 200.89,93.69 199.77,92.57 v195.36,92.57 | v164.5,152.89 130.59,152.89 128.05,150.35 87.16,150.35 85.13,152.39 78.91,152.39 75.1,148.58 28.79,148.58 v27.36,147.15
COM_AB
  Top 0.508: OR_1.3 194.73,88.12 197.27,85.58 OR_1.10
COM_ABCD  (via drill 0.7)
  Top 0.508: v200.44,94.85 196.25,90.66 v196.25,89.27 | v196.63,82.41 197.27,83.04 OR_1.8
  Bottom 0.508: TEENSY41.20-A6/TX5/LRCLK1 198.67,100.95 204.38,100.95 205.52,99.81 205.52,98.54 201.84,94.85 v200.44,94.85 | v196.25,89.27 196.25,82.79 v196.63,82.41
COM_B  (via drill 0.5)
  Top 0.406: COMP_2.4 24.38,104.25
  Top 0.508: 24.38,104.25 v24.55,104.25 | v60.74,74.33 103.83,74.33 121.46,91.96 137.78,91.96 142.64,96.83 143.44,96.83 144.23,96.04 175.86,96.04 176.27,95.63 177.77,95.63 179.8,93.6 179.8,91.66 182.07,89.39 OR_1.2
  Bottom 0.508: v24.55,104.25 24.55,86.85 38.46,72.95 59.36,72.95 v60.74,74.33
COM_C  (via drill 0.7)
  Top 0.406: COMP_3.4 202.73,81.27 v202.73,82.03 | v198.67,75.04 197.14,75.04 191.17,81.01 191.17,86.09 191.94,86.85 OR_1.4
  Bottom 0.406: v202.73,82.03 202.73,79.11 v198.67,75.04
COM_CD
  Top 0.508: OR_1.9 OR_1.6
COM_D  (via drill 0.7)
  Top 0.406: OR_1.5 192.19,85.58 191.94,85.33 191.94,82.68 193.48,81.14 194.48,81.14 198.41,77.2 203.11,77.2 v203.49,77.58 | v195.49,71.74 180,87.23 v180,88.63 | v175.04,91.3 175.81,91.3 176.57,92.06 176.57,94.47 175.61,95.43 170.44,95.43 170.37,95.36 148.54,95.36 143.55,95.36 v143.04,95.87 | v134.4,121.78 134.4,123.81 v135.93,125.33 | v140.63,133.46 144.18,137.02 v144.18,143.88 | v168.19,138.92 169.58,138.92 172.25,136.26 172.25,122.79 v173.52,121.52 | v197.4,122.41 197.4,126.1 v197.02,126.48 | v200.83,128.13 200.55,127.85 COMP_4.4
  Bottom 0.406: v203.49,77.58 197.65,71.74 v195.49,71.74 | v180,88.63 177.33,91.3 v175.04,91.3 | v143.04,95.87 143.04,99.93 135.67,107.3 135.67,117.08 134.79,117.97 133.77,117.97 133.13,118.6 133.13,120.51 v134.4,121.78 | v135.93,125.33 140.63,130.03 v140.63,133.46 | v144.18,143.88 163.23,143.88 v168.19,138.92 | v173.52,121.52 196.51,121.52 v197.4,122.41 | v197.02,126.48 198.67,128.13 v200.83,128.13
CS  (via drill 0.7)
  Top 0.508: v185.19,93.84 185.19,92.81 184.98,92.59 183.57,92.59 182.82,93.35 182.82,95.51 185.09,97.79 185.09,99.4 185.08,99.42 185.08,109.41 183.91,110.58 183.91,114.13 TEENSY41.10-CS\MQSR
  Bottom 0.508: JP8.20 111.54,115.81 109.45,113.71 109.45,99.17 118.09,90.54 124.41,90.54 149.86,65.09 167.64,65.09 167.89,65.33 172.15,65.33 172.59,65.76 172.62,65.76 185.19,78.33 v185.19,93.84
CS_MOT_A
  Top 0.406: COMP_1.3 26.05,143.9 DRIVER_A.CS
CS_MOT_B
  Top 0.406: COMP_2.3 25.72,105.42 DRIVER_B.CS
CS_MOT_C
  Top 0.406: COMP_3.3 205.37,78.83 DRIVER_C.CS
CS_MOT_D
  Top 0.406: COMP_4.3 204.49,126.62 DRIVER_D.CS
D13  (via drill 0.7)
  Top 0.508: v177.58,117.71 176.82,116.95 170.52,116.95 169.63,116.06 158.53,116.06 157.26,114.79 157.26,113.52 156.74,113 156.06,113 155.96,112.89 152.95,112.89 150.53,115.3 145.83,115.3 145.45,115.3 144.32,115.3 144.2,115.42 128.06,115.42 128.05,115.43 126.78,115.43 v114.08,102.73 | v175.17,89.77 173.39,88 168.82,88 166.28,85.46 JP1.33
  Bottom 0.508: TEENSY41.0-RX1/CS1/CRX2 209.33,114.79 208.32,115.81 195.36,115.81 193.01,118.17 178.04,118.17 v177.58,117.71 | v114.08,102.73 150.41,66.41 167.09,66.41 167.34,66.65 171.61,66.65 175.93,70.98 175.93,89.01 v175.17,89.77
D21  (via drill 0.7)
  Top 0.508: JP1.40 160.82,93.08 161.84,94.09 170.89,94.09 170.96,94.16 173.45,94.16 174.92,92.7 v175.17,92.7 | TEENSY41.21-A7/RX5/BCLK1 199.17,101.2 v198.16,102.22
  Bottom 0.508: v198.16,102.22 196.51,100.57 190.92,100.57 190.28,99.93 190.28,98.28 189.52,97.52 181.39,97.52 178.09,94.22 176.7,94.22 v175.17,92.7
D/C  (via drill 0.7)
  Top 0.508: TEENSY41.9-OUT1C 186.47,112.25 197.92,100.81 197.92,97.41 194.35,93.84 v194,93.84
  Bottom 0.508: JP8.25 103.92,118.6 101.51,116.19 101.51,95.55 111.86,85.2 123.2,85.2 147.94,60.46 148.35,60.46 154.1,54.72 174.15,54.72 190.41,70.98 190.41,77.59 194,81.18 v194,93.84
DRIBLER_PWM  (via drill 0.7)
  Top 0.508: v167.42,84.95 v167.43,84.95 167.96,85.47 172.39,85.47 177.58,90.66 v177.58,92.57
  Bottom 0.508: JP9.3 149.39,120.25 145.22,116.09 145.22,94.39 144.42,93.59 144.42,91.07 146.36,89.12 150.39,89.12 154.56,84.95 v167.42,84.95 | TEENSY41.22-A8/CTX1 201.71,98.79 199.66,96.73 181.8,96.73 178.62,93.56 178.32,93.56 177.58,92.82 v177.58,92.57
DRIBLER_SWITCH  (via drill 0.7)
  Top 0.508: v167.42,83.69 167.42,83.56 168.09,82.9 171.41,82.9 178.84,90.34 v178.84,92.57
  Bottom 0.508: JP9.1 146.85,118.86 144.55,116.56 144.55,95.05 143.49,93.99 143.49,90.79 146.07,88.21 149.74,88.21 154.25,83.69 v167.42,83.69 | TEENSY41.23-A9/CRX1/MCLK1 204.25,98.79 201.44,95.97 182.25,95.97 v178.84,92.57
FC_REC
  Top 0.508: JP2.3 84.87,117.97 84.87,119.75 88.56,123.43 125.13,123.43 JP8.5
GND  (via drill 0.35, 0.5, 0.7)
  Top 0.305: COMP_2.2 23.92,102.86 | C13.2 104.94,101.97 105.7,101.2 107.44,101.2 R12.2 108.84,102.6 C16.2 108.84,104.16 107.99,105.01 107.35,105.01 107.21,105.15 U2.11 107.21,109.05 107.23,109.06 | U2.18 107.23,109.06 | 107.23,109.06 U2.1 | U2.18 109.87,109.06 C15.2 | U2.18 108.97,109.59 C14.2 114.05,116.7 JP8.18
  Top 0.406: C4.2 23.11,141.08 COMP_1.2 | COMP_4.2 201.59,125.97 | 201.71,77.84 COMP_3.2 201.71,79.36 202.35,80 203.37,80 203.62,80.25 203.62,81.63 203.64,81.65 203.64,82.4 203.62,82.42 C6.2
  Top 0.508: 23.92,102.86 23.91,102.87 23.36,102.87 23.35,102.86 22.86,102.86 C5.2 22.14,103.83 22.14,107.17 DRIVER_A.GND_1 18.98,106.81 17.85,106.81 17.83,106.79 16.93,106.79 DRIVER_B.GND_2 | DRIVER_A.GND_2 16.04,143.75 16.04,141.76 C9.2 | DRIVER_A.GND_3 10.58,144.38 11.6,145.4 14.39,145.4 DRIVER_A.GND_2 | C4.2 20.27,141.81 19.47,142.61 19.47,144.51 18.58,145.4 16.93,145.4 DRIVER_A.GND_2 | 209.33,97.39 209.33,96.42 C8.2 209.63,93.97 C17.1 208.83,93.16 TRIM.1 207.68,91.43 205.65,89.39 DRIVER_C.GND_2 | 209.33,97.39 TEENSY41.GND6 207.68,100.57 207.68,108.19 v206.79,109.08 | DRIVER_D.GND_3 206.29,140.07 206.29,138.03 DRIVER_D.GND_2 204.47,136.22 C7.2 201.93,136.22 198.67,132.95 198.67,123.56 199.94,122.29 201.59,122.29 202.44,123.14 | 201.59,125.97 201.59,124.41 C12.2 202.44,123.14 | 202.44,123.14 203.53,123.14 204.13,122.54 206.16,122.54 209.77,118.93 211,118.93 211.56,118.37 211.56,117.14 211.87,116.83 TEENSY41.GND1 | 201.71,77.84 200.44,77.84 199.43,78.85 C11.2 197.33,79.15 194.73,81.75 194.49,81.75 OR_1.7 | 203.62,80.25 203.75,80.38 206.67,80.38 210.1,83.81 210.1,86.73 v208.06,88.76 | R2.2 186.39,103.91 v186.73,104.25 | v178.47,109.33 178.85,108.95 v178.85,106.54 v178.85,101.46 | v171.36,93.2 171.23,93.08 JP1.39 | v192.32,110.86 192.62,111.16 TEENSY41.GND5 | DRIVER_C.GND_3 205.65,95.74 207.3,97.39 209.33,97.39 | IO0.C IO1.C IO2.C IO3.C IO4.C IO5.C IO6.C IO7.C 121.7,2.41 122.8,2.62 INT.C 125.08,3.05 125.47,3.12 125.51,3.16 125.51,20.18 v142.02,36.69 | JP11.1 JP11.3 | JP11.3 86.14,125.72 81.06,120.64 JP2.2 | v103.92,140.83 v103.92,153.53 | JP12.3 JP12.1 91.48,126.35 90.11,124.98 87.39,124.98 JP11.3
  Top 0.813: DRIVER_B.GND_3 10.71,104 11.21,103.49 C10.2 15.79,103.53 DRIVER_B.GND_2
  Top 1.27: JP6.37 JP6.39 JP6.40 | JP6.37 JP6.35 | JP6.35 JP6.33 | JP6.33 JP6.31 JP6.29 JP6.27 JP6.25 JP6.23 JP6.21 | JP6.33 JP6.34 | JP6.35 JP6.36 | JP6.37 JP6.38 | LM2596S.6 17.56,95.11 18.83,96.38 19.24,95.97 LM2596S.5 28.23,96.2 C2.2 34.26,102.22 43.18,102.22 C3.2 | LM2596S.6 LM2596S.3 33.76,92.57 Z1.A | C1.2 17.56,90.59 LM2596S.6 | v23.28,130.03 22.14,130.03 10.58,141.59 DRIVER_A.GND_3 | JP1.25 166.54,75.3 167.68,76.44 167.68,79.87 169.46,81.65 DRIVER_C.GND | 154.72,68.44 154.6,68.31 v154.6,68.18
  Top 2: 22.14,71.99 22.14,71.36 DRIVER_B.GND_1 DRIVER_B.GND | JP2.2 80.81,119.49 79.67,119.49 78.91,118.73 78.91,113.78 89.45,103.24 97.07,103.24 102.15,98.16 108.75,98.16 111.93,101.33 111.93,104.63 119.16,111.87 JP8.14 | JP1.6 v151.17,49.9 147.1,53.96 147.1,57.77 149.39,60.06 154.6,60.06 | 154.6,60.06 154.6,66.91 154.72,67.04 | 154.72,67.04 154.72,68.44 154.72,81.01 | JP1.34 156.76,85.46 154.6,83.3 154.6,81.14 154.72,81.01 | JP1.30 155.36,80.38 154.72,81.01 | JP1.20 155.36,67.68 154.72,67.04 | JP1.14 154.6,60.06 | JP1.9 171.62,54.98 175.17,58.53 175.17,79.36 172.89,81.65 v172.76,81.65
  Top 5: LM2596S.6 17.56,81.01 22.14,76.44 22.14,71.99
  Bottom 0.508: TEENSY41.GND1 v206.79,109.08 199.86,109.08 197.78,111.16 | v208.06,88.76 206.16,88.76 DRIVER_C.GND_2 | v178.47,109.33 181.65,109.33 v186.73,104.25 192.32,109.84 v192.32,110.86 | v178.85,101.46 178.6,101.71 175.43,101.71 175.04,101.33 175.04,100.19 TEENSY41.GND3 171.36,93.97 v171.36,93.2 173.77,90.79 173.77,86.6 171.36,84.19 DRIVER_C.GND_1 | TEENSY41.GND2 v178.85,106.54 | v142.02,36.69 142.02,40.75 v151.17,49.9 | JP10.3 130.21,138.85 130.47,139.11 | 102.65,139.11 102.65,139.56 v103.92,140.83
  Bottom 0.813: 21.76,109.46 20.87,108.57 DRIVER_A.GND_1 | TEENSY41.GND5 197.78,111.16 TEENSY41.GND4
  Bottom 1.016: JP8.2 JP8.4 JP8.6 JP8.8 JP8.10 JP8.12 JP8.14 JP8.16 JP8.18
  Bottom 1.27: DRIVER_A.GND_1 DRIVER_A.GND
  Bottom 2: 162.34,126.86 160.19,126.86 JP9.10 JP9.8 JP9.6 JP9.4 | DRIVER_C.GND_1 DRIVER_C.GND v172.76,81.65 176.57,77.84 176.57,74.28 170.47,68.18 v154.6,68.18 152.44,68.18 112.81,107.81 112.81,111.62 116.62,115.43 JP8.16 | JP6.34 74.71,125.59 JP2.2 JP2.4 JP2.6
  Bottom 2.54: 22.01,72.63 22.01,71.23 DRIVER_B.GND_1 | 162.34,126.86 164,126.86 166.03,128.89 DRIVER_D.GND DRIVER_D.GND_1 | 15.66,122.41 21.76,116.32 21.76,109.46
  Bottom 6: 21.76,73.65 21.76,72.88 22.01,72.63
  Bottom 7: 20.74,74.92 21.76,73.9 21.76,73.65
  Bottom 8: JP6.40 52.87,137.27 | 52.87,137.27 30.52,137.27 v23.28,130.03 15.66,122.41 6.26,113.02 6.26,93.73 8.14,82.82 15.02,75.93 19.72,75.93 20.74,74.92 | 52.87,137.27 54.7,139.11 102.65,139.11 130.47,139.11 157.72,139.11 162.34,134.48 162.34,126.86
  pour Top (isolate 1): 16.2,61.59 arc-110 9.74,62.76 arc-49 9.96,152.67 arc-110 16.42,153.82 18.59,151.64 arc45 21.42,150.47 23.84,150.47 arc45 26.67,151.64 63.97,188.91 arc85 64.23,194.28 57.77,202.1 arc-102 57.92,202.86 arc-2 60.55,204.18 arc-52 60.99,204.18 60.99,204.18 arc-20 61.13,204.08 61.15,204.05 61.32,203.85 74.45,187.97 74.49,187.97 82.94,177.77 132.05,177.77 140.51,187.97 140.55,187.97 153.68,203.85 153.84,204.05 153.85,204.06 arc-23 154.01,204.18 154.01,204.18 arc-52 154.45,204.18 arc-2 157.08,202.86 arc-102 157.23,202.1 150.77,194.28 arc85 151.03,188.91 188.33,151.64 arc45 191.16,150.47 193.58,150.47 arc45 196.41,151.64 198.58,153.82 arc-110 205.04,152.67 arc-49 205.26,62.76 arc-110 198.79,61.59 198.38,62 arc45 195.55,63.17 188.87,63.17 arc45 186.04,62 153.04,28.97 arc45 151.87,26.15 151.87,19.46 arc45 153.04,16.63 153.46,16.22 arc-110 152.3,9.75 arc-28 101.21,0.16 arc-87 96.5,5.15 96.5,7.57 arc90 91.5,12.57 86.98,12.57 arc79 82.08,8.57 arc-96 75.7,4.78 arc-7 62.7,9.75 arc-110 61.54,16.22 61.95,16.63 arc45 63.13,19.46 63.13,26.15 arc45 61.96,28.97 28.96,62 arc45 26.13,63.17 19.44,63.17 arc45 16.62,62
  pour Bottom (isolate 1): 16.2,61.59 arc-110 9.74,62.76 arc-49 9.96,152.67 arc-110 16.42,153.82 18.59,151.64 arc45 21.42,150.47 23.84,150.47 arc45 26.67,151.64 63.97,188.91 arc85 64.23,194.28 57.77,202.1 arc-102 57.92,202.86 arc-2 60.55,204.18 arc-52 60.99,204.18 60.99,204.18 arc-20 61.13,204.08 61.15,204.05 61.32,203.85 74.45,187.97 74.49,187.97 82.94,177.77 132.05,177.77 140.51,187.97 140.55,187.97 153.68,203.85 153.84,204.05 153.85,204.06 arc-23 154.01,204.18 154.01,204.18 arc-52 154.45,204.18 arc-2 157.08,202.86 arc-102 157.23,202.1 150.77,194.28 arc85 151.03,188.91 188.33,151.64 arc45 191.16,150.47 193.58,150.47 arc45 196.41,151.64 198.58,153.82 arc-110 205.04,152.67 arc-49 205.26,62.76 arc-110 198.79,61.59 198.38,62 arc45 195.55,63.17 188.87,63.17 arc45 186.04,62 153.04,28.97 arc45 151.87,26.15 151.87,19.46 arc45 153.04,16.63 153.46,16.22 arc-110 152.3,9.75 arc-28 101.21,0.16 arc-87 96.5,5.15 96.5,7.57 arc90 91.5,12.57 86.98,12.57 arc79 82.08,8.57 arc-96 75.7,4.78 arc-7 62.7,9.75 arc-110 61.54,16.22 61.95,16.63 arc45 63.13,19.46 63.13,26.15 arc45 61.96,28.97 28.96,62 arc45 26.13,63.17 19.44,63.17 arc45 16.62,62
IN_A_MOT_A  (via drill 0.35)
  Top 0.508: TEENSY41.31-CTX3 156.6,114.77 156.6,115.07 158.26,116.72 169.36,116.72 170.25,117.61 173.42,117.61 175.04,119.24 175.04,139.05 v163.23,150.86
  Bottom 0.508: v163.23,150.86 131.23,150.86 128.69,148.32 86.21,148.32 83.85,150.68 79.59,150.68 79.6,150.67 75.86,146.92 36.23,146.92 DRIVER_A.INA
IN_A_MOT_B  (via drill 0.5)
  Top 0.508: v60.74,77.33 104.81,77.33 120.78,93.3 136.99,93.3 141.97,98.28 144.24,98.28 145.15,97.36 174.51,97.36 175.04,97.9 175.04,101.46 167.81,108.7 167.81,112.51 TEENSY41.27-A13/SCK1
  Bottom 0.508: DRIVER_B.INA 33.57,83.51 41.78,75.3 58.71,75.3 v60.74,77.33
IN_A_MOT_C  (via drill 0.7)
  Top 0.508: v189.78,110.98 190.28,110.48 190.28,109.47 196.01,103.74 196.38,103.74 196.75,103.37 v199.05,103.37 | v201.71,87.49 202.51,88.28 202.51,94.09 203.02,94.6 v203.11,94.6 | v193.59,77.2 199.3,71.49 DRIVER_C.INA
  Bottom 0.508: TEENSY41.25-A11/RX6/SDA2 174.03,111.36 189.4,111.36 v189.78,110.98 | v199.05,103.37 207.42,103.37 208.06,102.73 208.06,98.03 206.2,96.17 204.68,96.17 v203.11,94.6 | v201.71,87.49 199.2,84.97 199.2,81.12 195.28,77.2 v193.59,77.2
IN_A_MOT_D  (via drill 0.7)
  Top 0.508: DRIVER_D.INA 191.68,118.73 v190.16,117.21
  Bottom 0.508: v190.16,117.21 191.55,115.81 TEENSY41.7-RX2/OUT1A
IN_B_MOT_A  (via drill 0.35)
  Top 0.508: TEENSY41.30-CRX3 159.78,115.4 169.9,115.4 170.79,116.29 178.03,116.29 178.8,117.06 178.8,119.33 177.35,120.78 177.35,142.08 v166.03,153.4
  Bottom 0.508: DRIVER_A.INB 25.95,149.34 74.71,149.34 78.52,153.15 85.51,153.15 87.54,151.12 127.67,151.12 130.47,153.91 165.52,153.91 v166.03,153.4
IN_B_MOT_B  (via drill 0.5)
  Top 0.508: v60.74,72.84 103.4,72.84 121.87,91.3 142.19,91.3 145.64,94.75 146.09,94.75 148.28,94.75 148.29,94.75 170.62,94.75 170.69,94.82 174.31,94.82 v174.79,94.35 | v176.44,100.7 176.44,101.59 168.95,109.08 168.95,113.9 TEENSY41.26-A12/MOSI1
  Bottom 0.508: DRIVER_B.INB 20.87,87.95 36.92,71.9 59.81,71.9 v60.74,72.84 | v174.79,94.35 177.58,97.14 177.58,100.06 176.95,100.7 v176.44,100.7
IN_B_MOT_C  (via drill 0.7)
  Top 0.508: v190.67,111.87 191.17,111.37 191.17,109.84 196.38,104.63 v199.05,104.63 | v207.81,95.87 207.81,94.09 206.79,93.08 205.02,93.08 204.38,92.44 v204.38,90.54 | v191.55,77.33 199.56,69.33 205.66,69.33 206.59,70.25 208.45,75.46 v208.45,79.74
  Bottom 0.508: TEENSY41.24-A10/TX6/SCL2 175.68,112.25 190.29,112.25 v190.67,111.87 | v199.05,104.63 207.94,104.63 210.6,101.97 210.6,96.51 209.97,95.87 v207.81,95.87 | v204.38,90.54 202.73,90.54 198.03,85.84 198.03,81.9 194.6,78.47 192.7,78.47 v191.55,77.33 | v208.45,79.74 208.45,82.41 206.67,84.19 DRIVER_C.INB
IN_B_MOT_D
  Bottom 0.508: TEENSY41.32-OUT1B 155.61,116.32 169.46,116.32 172,118.86 172,124.32 179.11,131.43 DRIVER_D.INB
INT_3V  (via drill 0.7)
  Top 0.508: JP6.9 55.66,96.38 64.42,96.38 67.64,93.16 94.78,93.16 v95.03,92.9 111.88,92.9 130.44,111.46 142.56,111.46 142.68,111.34 144.66,111.34 148.19,107.81 167.17,107.81 173.77,101.2 TEENSY41.41-A17/MISO1 | R11.2 117.21,13.83 v117.21,36.69 | v95.03,79.87 v95.03,84.31
  Bottom 0.508: v117.21,36.69 117.21,55.21 95.03,77.39 v95.03,79.87 | v95.03,84.31 v95.03,92.9
IO0_3V  (via drill 0.7)
  Top 0.508: JP6.1 55.66,83.68 60.62,83.68 62.78,85.84 84.67,85.84 84.84,85.67 | TEENSY41.33-MCLK2 151.08,101.3 127.74,101.3 112.12,85.67 84.84,85.67 | R3.2 107.14,13.71 v107.14,36.69 | 84.84,85.67 84.84,80 v84.96,79.87
  Bottom 0.508: v107.14,36.69 107.14,53.79 84.96,75.97 v84.96,79.87
IO1_3V  (via drill 0.7)
  Top 0.508: JP6.2 60.06,84.95 61.81,86.7 v86.14,86.7 112.21,86.7 127.47,101.96 153.79,101.96 155.99,99.75 TEENSY41.34-RX8 | R4.2 108.4,12.43 v108.4,36.69 | v86.22,79.87 v86.22,84.31
  Bottom 0.508: v108.4,36.69 108.4,53.97 86.22,76.15 v86.22,79.87 | v86.22,84.31 86.22,86.62 v86.14,86.7
IO2_3V  (via drill 0.7)
  Top 0.508: JP6.3 55.16,87.49 56.43,86.22 58.97,86.22 60.11,87.36 63.24,87.36 63.55,87.67 v87.41,87.67 88.24,87.67 88.29,87.63 112.21,87.63 127.2,102.62 154.16,102.62 157.86,98.92 TEENSY41.35-TX8 | R5.2 109.66,11.14 v109.66,36.69 | v87.48,79.87 v87.48,84.31
  Bottom 0.508: v109.66,36.69 109.66,54.14 87.48,76.33 v87.48,79.87 | v87.48,84.31 87.41,84.38 v87.41,87.67
IO3_3V  (via drill 0.7)
  Top 0.508: JP6.4 58.46,87.49 58.99,88.02 62.71,88.02 63.32,88.63 88.64,88.63 v88.68,88.59 89.53,88.59 89.56,88.56 112.21,88.56 126.92,103.28 154.44,103.28 157.64,100.08 159.02,100.08 159.62,99.48 160.52,99.48 TEENSY41.36-PWM | R6.2 110.92,9.86 v110.92,36.69 | v88.74,79.87 v88.74,84.31
  Bottom 0.508: v110.92,36.69 110.92,54.32 88.74,76.5 v88.74,79.87 | v88.74,84.31 88.68,84.37 v88.68,88.59
IO4_3V  (via drill 0.7)
  Top 0.508: JP6.5 55.28,90.03 56.55,88.76 62.51,88.76 63.3,89.55 89.08,89.55 89.11,89.52 v89.95,89.52 90.76,89.52 90.83,89.46 112.17,89.46 126.65,103.94 154.71,103.94 157.91,100.74 159.29,100.74 159.89,100.14 162.4,100.14 TEENSY41.37-PWM | R7.2 110.78,7.61 112.18,9 v112.18,36.69 | v90,79.87 v90,84.31
  Bottom 0.508: v112.18,36.69 112.18,54.5 90,76.68 v90,79.87 | v90,84.31 89.95,84.36 v89.95,89.52
IO5_3V  (via drill 0.7)
  Top 0.508: JP6.6 58.72,90.03 59.29,89.46 62.28,89.46 63.36,90.54 91.05,90.54 91.18,90.42 v91.22,90.42 91.16,90.42 91.21,90.37 112.15,90.37 126.38,104.6 138.21,104.6 154.98,104.6 158.18,101.4 159.56,101.4 160.16,100.8 164.27,100.8 TEENSY41.38-A14/CS/IN1 | v113.44,36.69 113.44,7.3 R8.2 | v91.26,79.87 v91.26,84.31
  Bottom 0.508: v113.44,36.69 113.44,54.68 91.26,76.86 v91.26,79.87 | v91.26,84.31 91.22,84.35 v91.22,90.42
IO6_3V  (via drill 0.7)
  Top 0.508: JP6.7 55.77,91.2 57.42,91.2 57.44,91.17 57.95,91.17 58.54,91.76 58.54,93.63 59.67,94.75 63.09,94.75 66.39,91.46 92.49,91.46 v92.49,91.33 92.56,91.33 92.73,91.16 112,91.16 130.98,110.14 142.01,110.14 142.13,110.02 143.86,110.02 147.96,105.92 155.53,105.92 158.72,102.73 167.42,102.73 168.69,101.46 TEENSY41.39-A15/CS/OUT1A | R9.2 114.7,8.48 v114.7,36.69 | v92.52,79.87 v92.52,84.31
  Bottom 0.508: v114.7,36.69 114.7,54.86 92.52,77.04 v92.52,79.87 | v92.52,84.31 92.49,84.34 v92.49,91.33
IO7_3V  (via drill 0.7)
  Top 0.508: JP6.8 57.1,92.57 57.12,92.59 57.12,93.4 59.27,95.54 63.74,95.54 66.91,92.37 93.51,92.37 v93.76,92.12 93.83,92.12 94,91.94 111.85,91.94 130.71,110.8 142.28,110.8 142.4,110.68 144.26,110.68 148.36,106.58 155.81,106.58 157.23,105.16 167.41,105.16 171.23,101.33 TEENSY41.40-A16/CS1 | R10.2 115.96,9.89 v115.96,36.69 | v93.78,79.87 v93.78,84.31
  Bottom 0.508: v115.96,36.69 115.96,55.04 93.78,77.22 v93.78,79.87 | v93.78,84.31 93.76,84.32 v93.76,92.12
KICK  (via drill 0.8)
  Top 0.508: v60.74,97.65 64.72,97.65 68.42,93.95 111.99,93.95 130.16,112.12 142.83,112.12 142.95,112 145.19,112 148.29,108.9 v155.82,108.9
  Bottom 0.508: JP6.10 59.47,97.65 v60.74,97.65 | v155.82,108.9 158.71,108.9 164.86,102.75 178.49,102.75 178.5,102.75 179.73,102.75 181.39,101.08 TEENSY41.14-A0/TX3/SPDIF_OUT
LED-  (via drill 0.5)
  Top 0.508: JP8.3 126.78,124.32 87.41,124.32 v84.87,121.78
  Bottom 0.508: v84.87,121.78 88.68,121.78 JP2.10
MISO  (via drill 0.7)
  Top 0.508: v190.23,93.84 189.93,93.54 189.93,93.44 187.53,91.04 182.66,91.04 181.12,92.59 181.12,96.56 180.12,97.56 180.12,112.89 TEENSY41.12-MISO/MQSL
  Bottom 0.508: JP8.24 106.46,115.43 105.07,114.03 105.07,96.95 114.53,87.49 123.72,87.49 148.77,62.44 149.6,62.44 155.04,57 172.88,57 188.43,72.56 188.43,79.2 190.23,80.99 v190.23,93.84
MOSI  (via drill 0.7)
  Top 0.508: v187.71,93.84 187.71,92.41 187.11,91.81 183.3,91.81 181.9,93.2 181.9,97.27 182.55,97.92 182.55,99.4 182.54,99.42 182.54,113.02 TEENSY41.11-MOSI/CTX1
  Bottom 0.508: JP8.22 109,115.56 107.23,113.78 107.23,110.35 107.23,98.09 116.31,89.01 124.06,89.01 149.31,63.76 168.19,63.76 168.43,64.01 171.44,64.01 171.69,63.76 172.46,63.76 172.93,64.24 173.77,64.24 187.11,77.59 187.11,80.89 187.46,81.23 187.46,93.58 v187.71,93.84
MOT_A_A
  Bottom 2: JP3.1 JP3.3 JP3.5 67.09,116.7 65.82,115.43 65.82,95.86 67.12,94.57 67.12,89.65 63.8,86.33 63.8,83.14 57.99,77.33 45.72,77.33 38.27,84.79 38.27,105.65 35.34,108.57 DRIVER_A.OUTA DRIVER_A.OUTA_1
MOT_A_B
  Bottom 2: JP3.2 JP3.4 JP3.6 66.04,119.24 62.65,115.85 62.65,95.7 64.58,93.77 64.58,90.71 60.88,87.01 60.88,83.82 56.93,79.87 46.77,79.87 40.81,85.84 40.81,106.79 36.49,111.11 29.63,111.11 28.36,109.84 DRIVER_A.OUTB DRIVER_A.OUTB_1
MOT_B_A
  Bottom 2: DRIVER_B.OUTA_1 DRIVER_B.OUTA 61.63,70.09 71.54,80 71.54,93.19 69.37,95.36 69.37,99.3 JP7.1 JP7.3 JP7.5
MOT_B_B
  Bottom 2: DRIVER_B.OUTB_1 DRIVER_B.OUTB 28.49,68.44 30.14,66.79 62.69,66.79 74.52,78.62 74.52,94.65 73.06,96.11 72.45,96.11 JP7.2 JP7.4 JP7.6
MOT_C_A
  Bottom 2: DRIVER_C.OUTA DRIVER_C.OUTA_1 150.91,74.03 129.32,95.61 129.32,97.65 130.59,98.92 JP5.1 JP5.3 JP5.5
MOT_C_B
  Bottom 2: DRIVER_C.OUTB_1 DRIVER_C.OUTB 159,76.57 149.03,86.55 145.23,86.55 138.21,93.57 JP5.6 JP5.4 JP5.2
MOT_D_A
  Top 2: JP4.5 JP4.3 JP4.1 143.18,116.96 146.39,116.96 147.79,118.36 168.95,118.36 168.95,118.48 DRIVER_D.OUTA DRIVER_D.OUTA_1
MOT_D_B  (via drill 0.8)
  Top 2: JP4.2 JP4.4 JP4.6 138.09,141.97 v142.02,145.91
  Bottom 2: DRIVER_D.OUTB_1 DRIVER_D.OUTB 172.5,127.11 172.5,138.29 164.88,145.91 v142.02,145.91 v140.75,144.64
N$1
  Top 0.508: IO0.A R3.1
N$2
  Top 0.508: IO1.A R4.1
N$3
  Top 0.305: U2.20 107.21,111.57 C14.1
N$4
  Top 0.508: IO2.A R5.1
N$5
  Top 0.305: U2.9 106.21,102.51 R12.1
N$6
  Top 0.508: IO3.A R6.1
N$7
  Top 0.305: C16.1 106.71,104.55 U2.10
N$8
  Top 0.508: R7.1 IO4.A
N$10
  Top 0.508: R8.1 IO5.A
N$12
  Top 0.508: R9.1 IO6.A
N$14
  Top 0.508: R10.1 IO7.A
N$16
  Top 0.508: R11.1 INT.A
N$61
  Top 1.27: LM2596S.2 31.01,90.87 Z1.C 31.73,89.08 33.31,87.49 38.27,87.49 39.79,89.01 L2.1
ON/OFF  (via drill 0.5)
  Top 0.508: TEENSY41.ON/OFF 160.44,101.46 159.84,102.06 158.46,102.06 155.26,105.26 146.8,105.26 143.29,108.76 v143.29,109.08
  Bottom 0.508: v143.29,109.08 136.31,116.06 136.31,117.33 JP8.1
PWM_MOT_A  (via drill 0.35, 0.8)
  Top 0.508: v175.81,117.97 175.81,139.93 v163.87,151.88
  Bottom 0.508: TEENSY41.6-OUT1D 194.09,115.68 192.34,117.44 191.37,117.44 191.37,116.93 192.21,116.08 192.21,115.14 192.71,114.64 192.71,113.68 192.04,113 191.07,113 190.39,113.68 190.39,114.64 190.89,115.14 190.89,115.54 190.18,116.25 189.76,116.25 189.2,116.81 189.2,117.44 178.66,117.44 177.98,116.75 177.19,116.75 176.62,117.32 176.62,117.97 v175.81,117.97 | DRIVER_A.PWM 32.04,147.81 75.48,147.81 79.16,151.5 84.75,151.5 86.91,149.34 128.44,149.34 130.98,151.88 v163.87,151.88
PWM_MOT_B  (via drill 0.5)
  Top 0.508: v60.74,75.83 104.39,75.83 121.19,92.63 137.38,92.63 142.37,97.62 143.71,97.62 144.63,96.7 176.7,96.7 177.58,97.59 177.58,102.6 169.96,110.22 169.96,114.53 171.07,115.63 184.85,115.63 185.44,116.22 194.58,116.22 TEENSY41.5-IN2
  Bottom 0.508: DRIVER_B.PWM 28.49,86.01 40.37,74.12 59.04,74.12 v60.74,75.83
PWM_MOT_C  (via drill 0.7)
  Top 0.508: DRIVER_C.PWM 196.63,76.57 193.97,79.23 193.97,79.74 v194.09,79.87 | v201.33,92.44 201.59,92.7 201.59,96 202.98,97.39 202.98,107.17 v202.6,107.55
  Bottom 0.508: v194.09,79.87 195.11,80.88 195.11,90.79 195.62,91.3 200.19,91.3 v201.33,92.44 | v202.6,107.55 195.87,107.55 193.71,109.71 193.71,111.62 194.73,112.63 198.16,112.63 199.17,113.65 TEENSY41.4-BCLK2
PWM_MOT_D  (via drill 0.7)
  Top 0.508: TEENSY41.3-LRCLK2 203.87,116.32 205.27,116.32 v207.05,118.1
  Bottom 0.508: v207.05,118.1 207.05,122.16 205.4,123.81 DRIVER_D.PWM
PWR_BTN
  Top 0.508: JP8.11 119.93,121.02 101.18,121.02 93.43,113.27 84.49,113.27 JP2.1
REF_MOTOR  (via drill 0.35, 0.5, 0.7)
  Top 0.406: COMP_2.1 26.31,102.21 27.09,102.98 27.09,109.59 26.33,110.35 v25.18,110.35 | COMP_4.1 203.51,125.32 v203.75,125.08
  Top 0.508: 29.32,137.21 32.8,133.72 v32.8,129.4 | 29.32,137.21 COMP_1.1 | v173.77,124.32 174.16,124.7 174.16,138.29 v162.85,149.59 | v208.95,117.97 208.06,117.08 208.06,113.65 206.92,112.51 204.89,112.51 204.36,111.98 204.36,101.09 205.52,99.93 205.52,96.76 204.2,95.43 204.2,93.7 203.29,92.8 203.29,89.46 204.76,88 | C17.2 211.07,89.18 TRIM.2 210.53,89.72 207.41,89.72 206.98,89.28 206.98,88 204.76,88 | 204.76,88 201.71,84.95 201.71,80.25 201.06,79.6 COMP_3.1 | v37.88,145.91 37.88,145.78 29.32,137.21
  Bottom 0.508: v32.8,129.4 32.8,117.97 v25.18,110.35 | v173.77,124.32 202.98,124.32 v203.75,125.08 206.54,125.08 209.46,122.16 209.46,118.48 v208.95,117.97 | v37.88,145.91 80.19,145.91 81.61,144.49 134,144.49 139.1,149.59 v162.85,149.59
RXD/D15  (via drill 0.7)
  Top 0.508: JP1.10 152.06,54.98 v150.15,56.88 | TEENSY41.29-TX7 159.7,112.79 157.46,112.79 157.01,112.34 156.34,112.34 156.23,112.23 152.67,112.23 150.26,114.64 144.04,114.64 143.92,114.76 128.1,114.76 110.09,96.75 94.84,96.75 v94.4,97.19
  Bottom 0.508: v150.15,56.88 v146.72,60.31 123.36,83.68 107.73,83.68 107.73,83.72 94.4,97.06 v94.4,97.19
SCK  (via drill 0.7)
  Top 0.508: v192.75,93.84 192.75,92.74 190.26,90.26 182.26,90.26 180.46,92.06 180.46,95.4 179.48,96.38 v178.85,96.38
  Bottom 0.508: JP8.26 103.92,116.44 102.78,115.3 102.78,95.93 112.75,85.96 123.38,85.96 148.22,61.12 148.77,61.12 154.41,55.48 173.64,55.48 189.75,71.59 189.75,78.32 192.75,81.31 v192.75,93.84 | v178.85,96.38 TEENSY41.13-SCK/LED
SCL  (via drill 0.7)
  Top 0.305: U2.23 105.71,112.43 R13.2 107.73,114.45 107.73,117.59 108.12,117.97 110.27,117.97 JP8.19
  Top 0.508: v186.45,93.84 186.45,95.34 187.36,96.25 191.43,96.25 TEENSY41.19-A5/SCL0 | v80.3,106.28 82.33,104.25 84.49,104.25 v85.13,104.89
  Bottom 0.508: v186.45,93.84 186.45,78.2 173.26,65 172.76,65 172.43,64.67 168.16,64.67 167.92,64.43 149.59,64.43 124.24,89.77 117.2,89.77 108.31,98.66 108.31,113.59 110.27,115.56 110.27,117.84 111.54,119.11 JP8.19 110.27,120.51 103.29,120.51 100.5,117.71 100.5,115.17 90.21,104.89 v85.13,104.89 | v80.3,106.28 80.3,109.21 83.1,112 89.95,112 95.03,117.08 95.03,123.18 89.32,128.89 88.81,128.89 JP11.6 90.08,130.16 121.96,130.16 JP12.6
SDA  (via drill 0.7)
  Top 0.305: U2.24 104.92,110.07 | 104.92,110.07 104.77,110.22 R14.2 | 104.92,110.07 104.92,114.54 104.92,115.41 105.19,115.68 105.19,119.75 105.83,120.38 112.94,120.38 JP8.17
  Top 0.508: v183.93,93.84 183.93,95.62 185.46,97.14 190.03,97.14 191.55,98.66 TEENSY41.18-A4/SDA0 | v78.91,105.01 80.43,103.49 v85.89,103.49 | v98.84,107.81 98.84,111.24 102.15,114.54 104.92,114.54
  Bottom 0.508: JP8.17 112.81,117.97 112.81,115.3 110.59,113.08 110.59,99.68 118.97,91.3 124.58,91.3 150.13,65.75 167.37,65.75 167.61,65.99 171.88,65.99 176.59,70.7 176.59,71.38 183.93,78.73 v183.93,93.84 | v78.91,105.01 78.91,110.73 81.06,112.89 89.45,112.89 93.76,117.21 93.76,119.24 88.68,124.32 JP11.5 87.41,127.49 87.41,129.65 88.81,131.05 123.23,131.05 124.88,129.4 124.88,128 JP12.5 | v85.89,103.49 85.92,103.47 96.07,103.47 98.84,106.24 v98.84,107.81
SYS_RST
  Top 0.508: JP8.7 123.36,122.67 100.24,122.67 95.52,117.94 86.4,117.94 86.14,117.69 JP2.5
T_CS  (via drill 0.7)
  Top 0.508: v188.97,93.84 189.27,94.14 189.27,94.24 190.52,95.49 193.21,95.49 195.36,97.65 195.36,101.08 185.09,111.35 185.09,114.64 185.08,114.66 185.08,114.67 185.84,115.43 187.74,115.43 TEENSY41.8-TX2/IN1
  Bottom 0.508: JP8.21 107.73,117.97 107.73,115.56 106.21,114.03 106.21,97.46 115.42,88.25 123.89,88.25 149.04,63.1 168.46,63.1 168.71,63.35 171.17,63.35 171.41,63.1 172.73,63.1 173.08,63.45 174.17,63.45 187.77,77.06 187.77,79.76 188.97,80.96 v188.97,93.84
T_IRQ  (via drill 0.7)
  Top 0.508: v198.29,94.98 200.33,97.03 200.33,99.4 200.32,99.42 200.32,108.95 201.71,110.35 201.71,112.25 202.22,112.76 203.24,112.76 204.25,113.78 TEENSY41.2-OUT2
  Bottom 0.508: JP8.23 105.19,117.97 105.19,115.68 103.92,114.41 103.92,96.44 113.64,86.73 123.55,86.73 148.49,61.78 149.18,61.78 154.73,56.24 173.39,56.24 189.09,71.95 189.09,78.8 191.49,81.2 191.49,94.41 192.06,94.98 v198.29,94.98
TXD/D14  (via drill 0.7)
  Top 0.508: JP1.8 152.57,52.44 v149.64,55.36 | TEENSY41.28-RX7 163.61,114.04 161.69,112.12 157.73,112.12 157.28,111.68 156.61,111.68 156.5,111.57 152.4,111.57 149.99,113.98 143.77,113.98 143.65,114.1 128.76,114.1 110.75,96.09 93.35,96.09 v92.75,96.69
  Bottom 0.508: v149.64,55.36 145.71,59.29 v145.71,59.42 123.38,81.75 108.01,81.75 93.07,96.69 v92.75,96.69
V_BAT
  Top 0.508: TEENSY41.16-A2/RX4/SCL1 186.47,99.68 188.09,101.29 R2.1 R1.2
V_CAP  (via drill 0.8)
  Top 0.508: JP6.12 58.76,97.65 59.77,98.66 65.4,98.66 69.41,94.65 111.55,94.65 129.68,112.78 143.1,112.78 143.22,112.66 145.59,112.66 148.25,110.01 v157.3,110.01
  Bottom 0.508: v157.3,110.01 157.3,112.29 157.77,112.76 159,112.76 163.95,107.81 181.39,107.81 189.01,100.19 TEENSY41.17-A3/TX4/SDA1

## Text on the board
Top: Jakub Gal | 2021
Bottom: Jakub Gal | 2021
tNames: D | A | B | C
tStop: Jakub Gal | 2021
bStop: Jakub Gal | 2021